# Altium PCB HB_mini_alt_PCB.PcbDoc
Units mm, origin at the board's own origin, x right, y up, seen from the top; angles counter-clockwise.
Board outline 59.4 x 59.4 mm, 2 copper layers (Top Layer, Bottom Layer), stack 0.971 mm thick; 98 components, 57 nets, 300 pads, 177 vias.
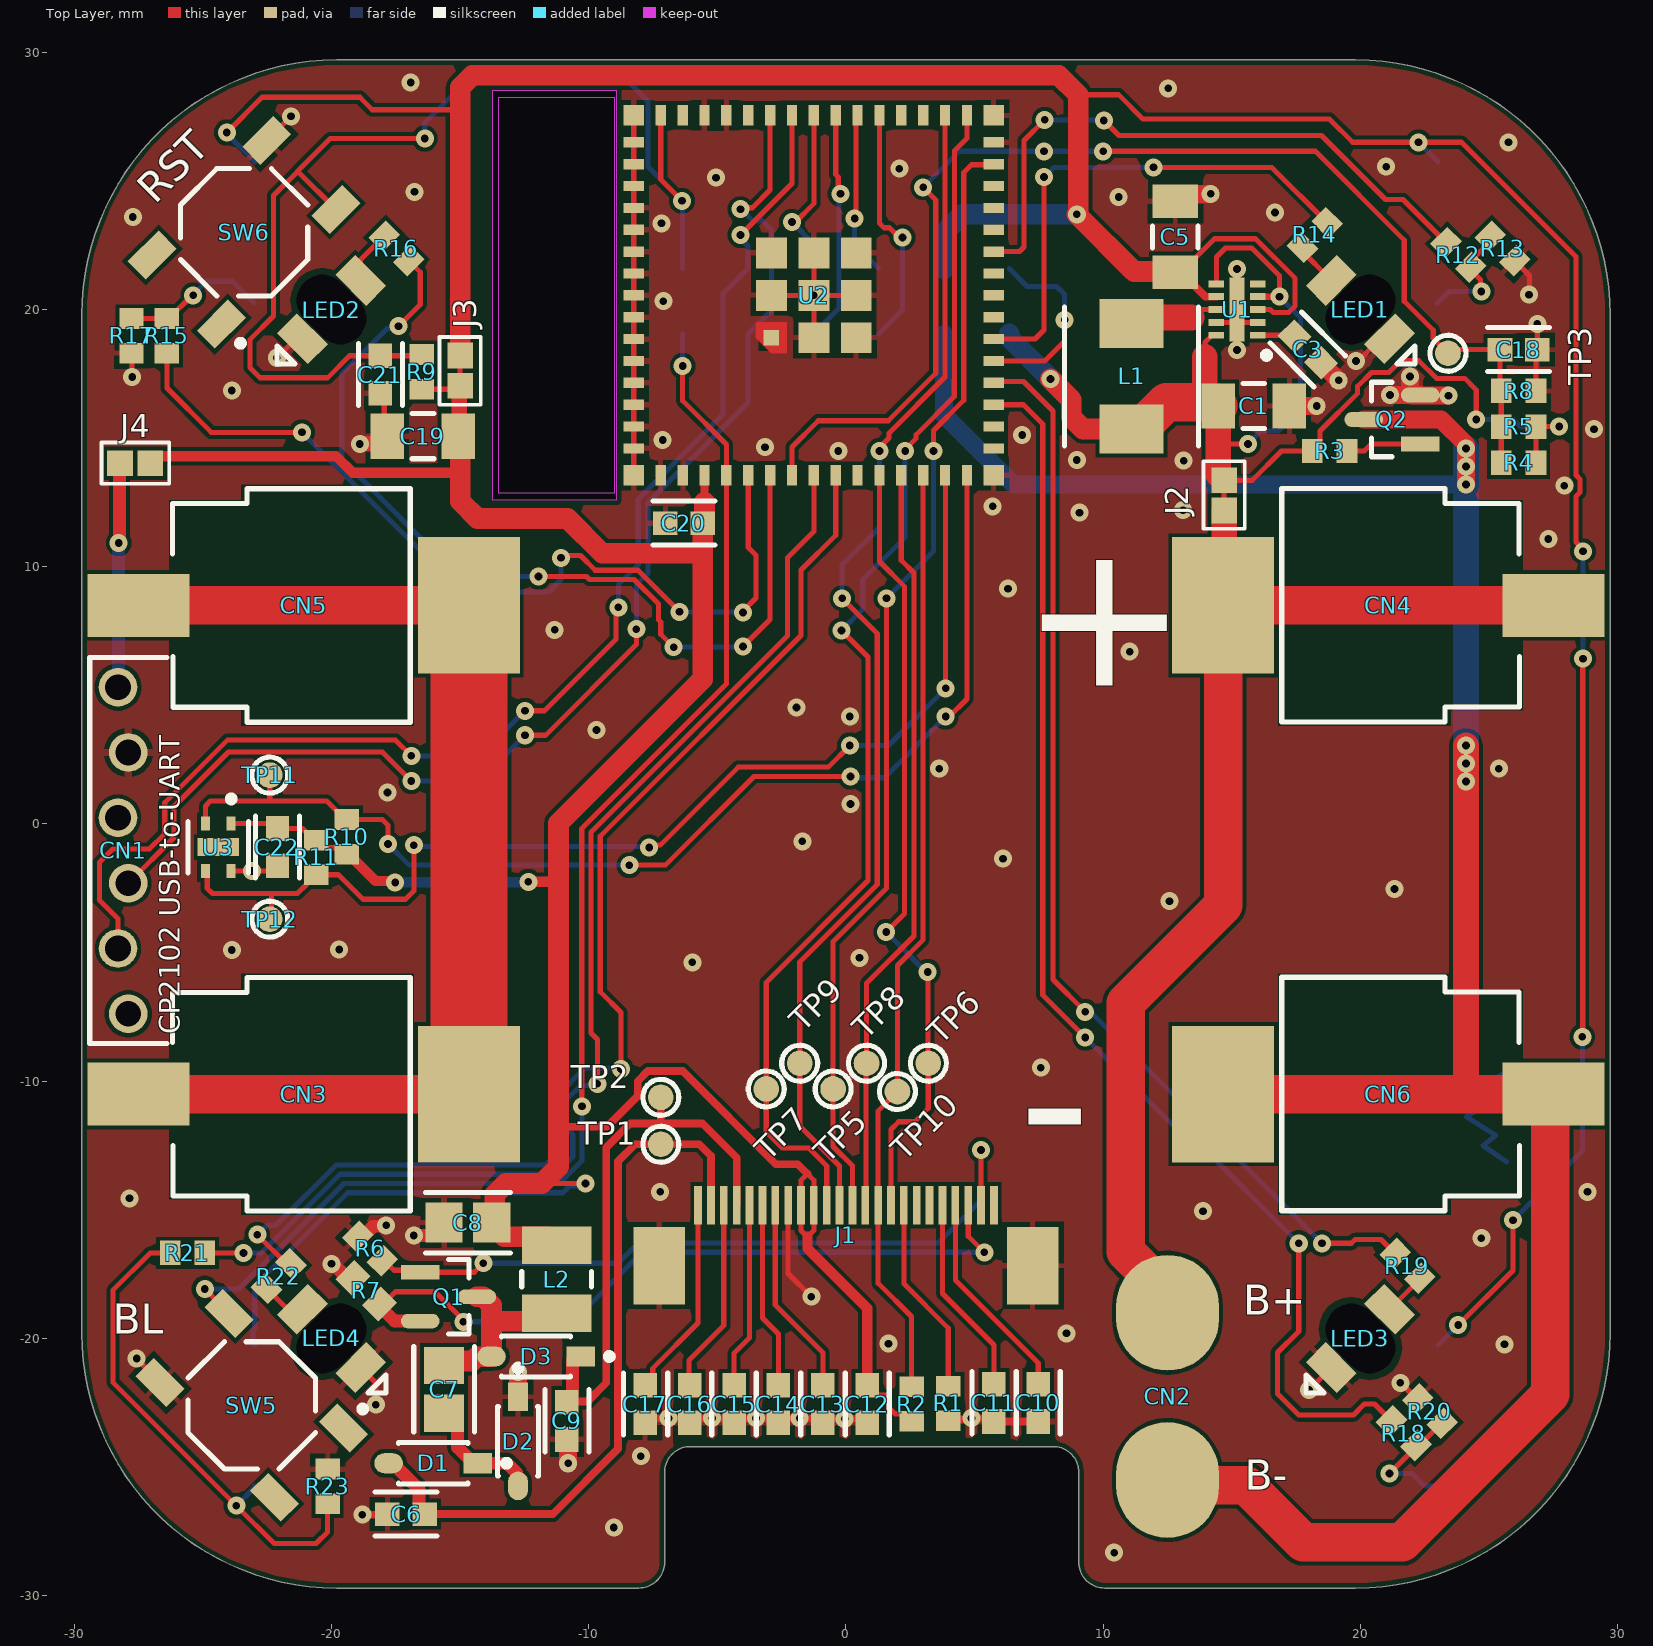
[diagram p0: Top Layer view]
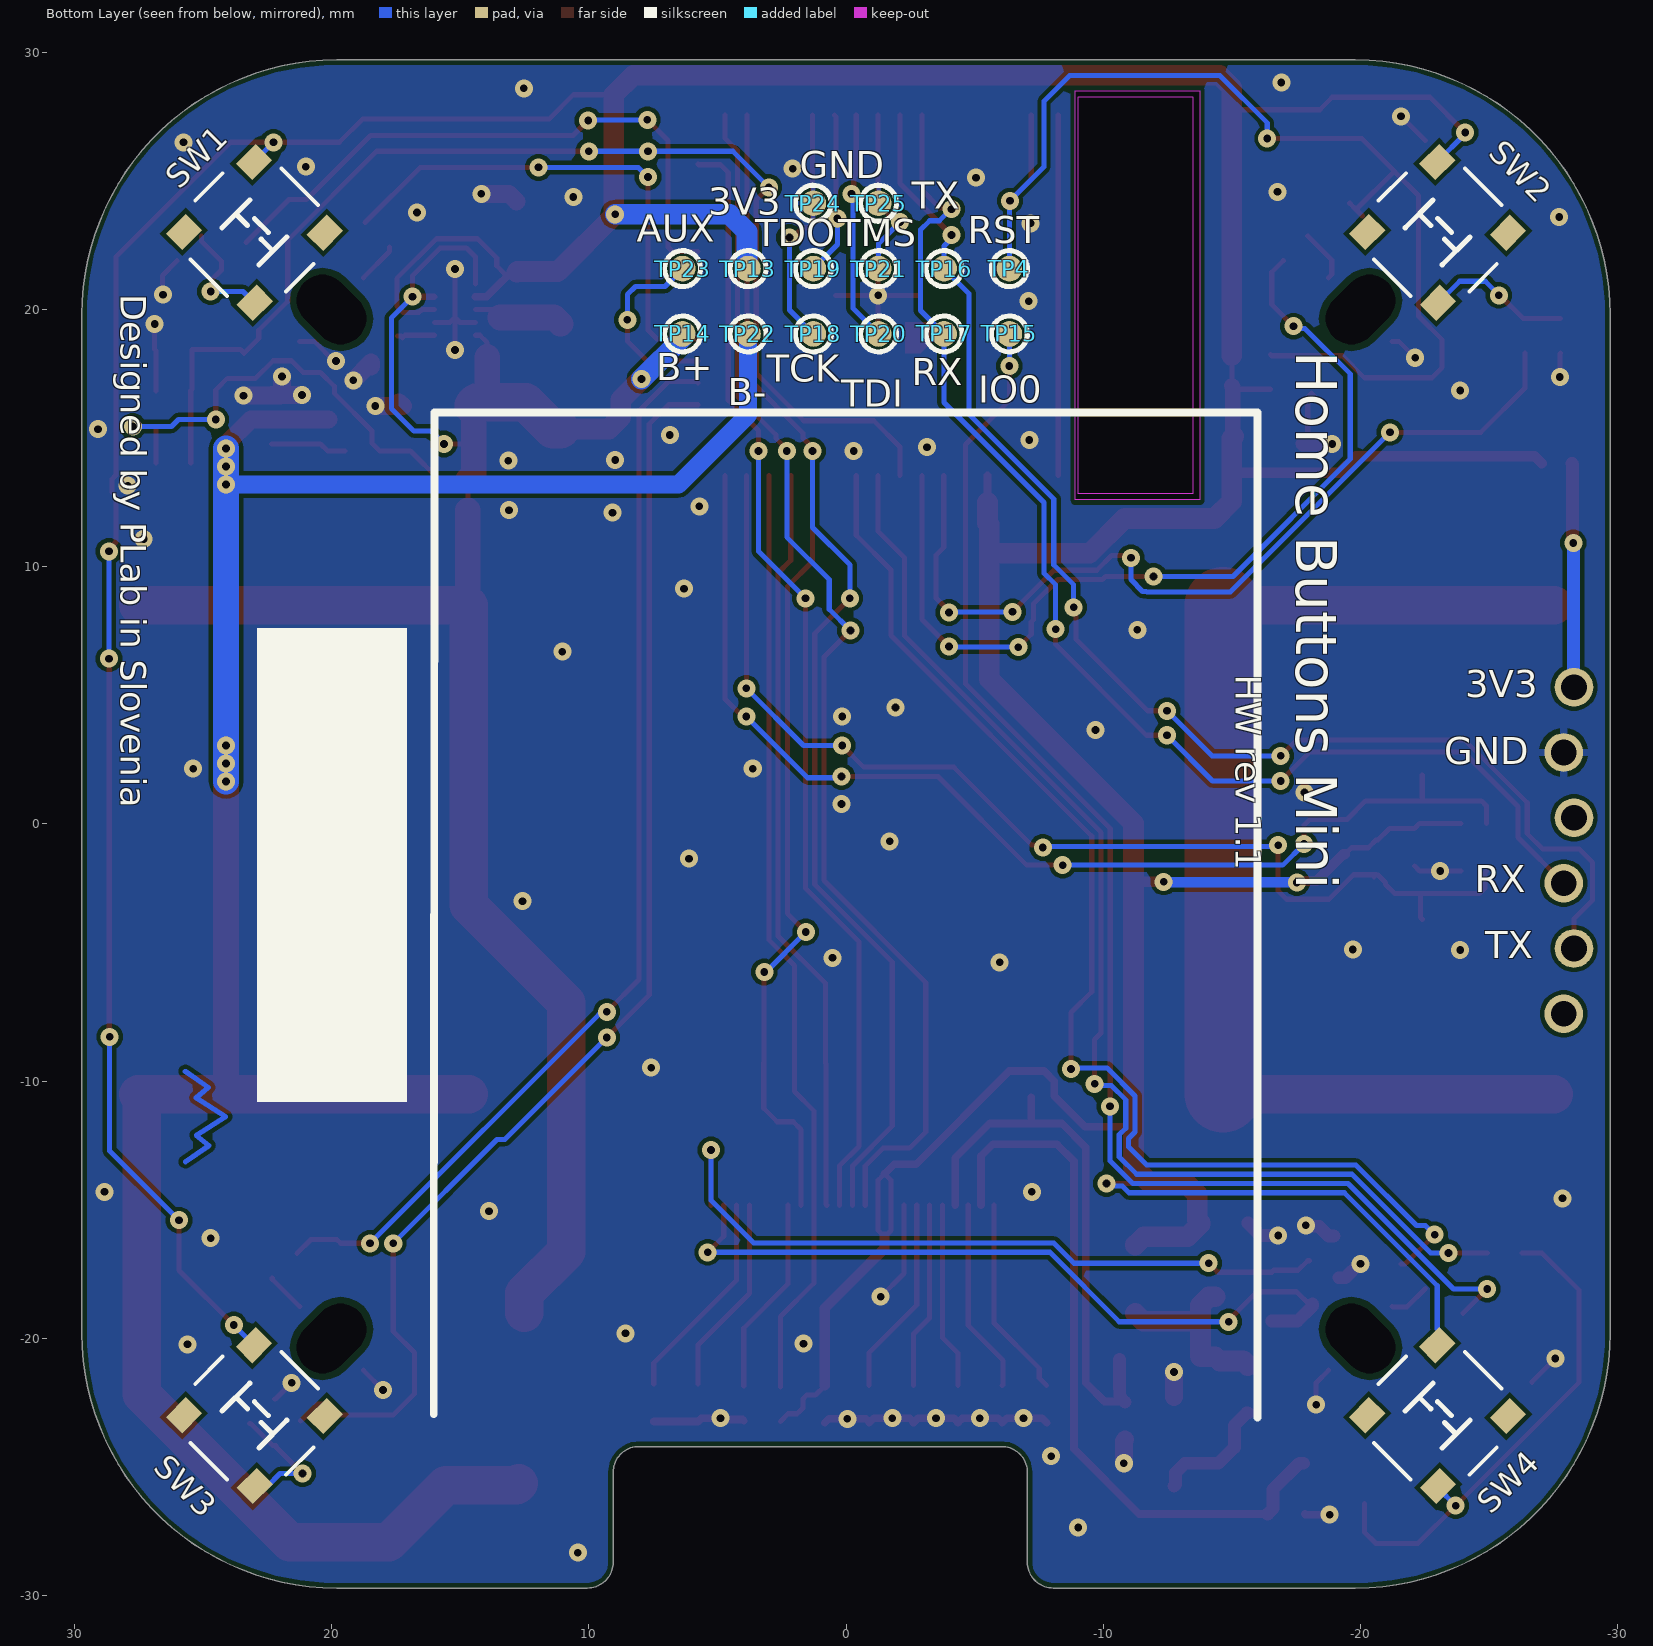
[diagram p1: Bottom Layer view, seen from below]
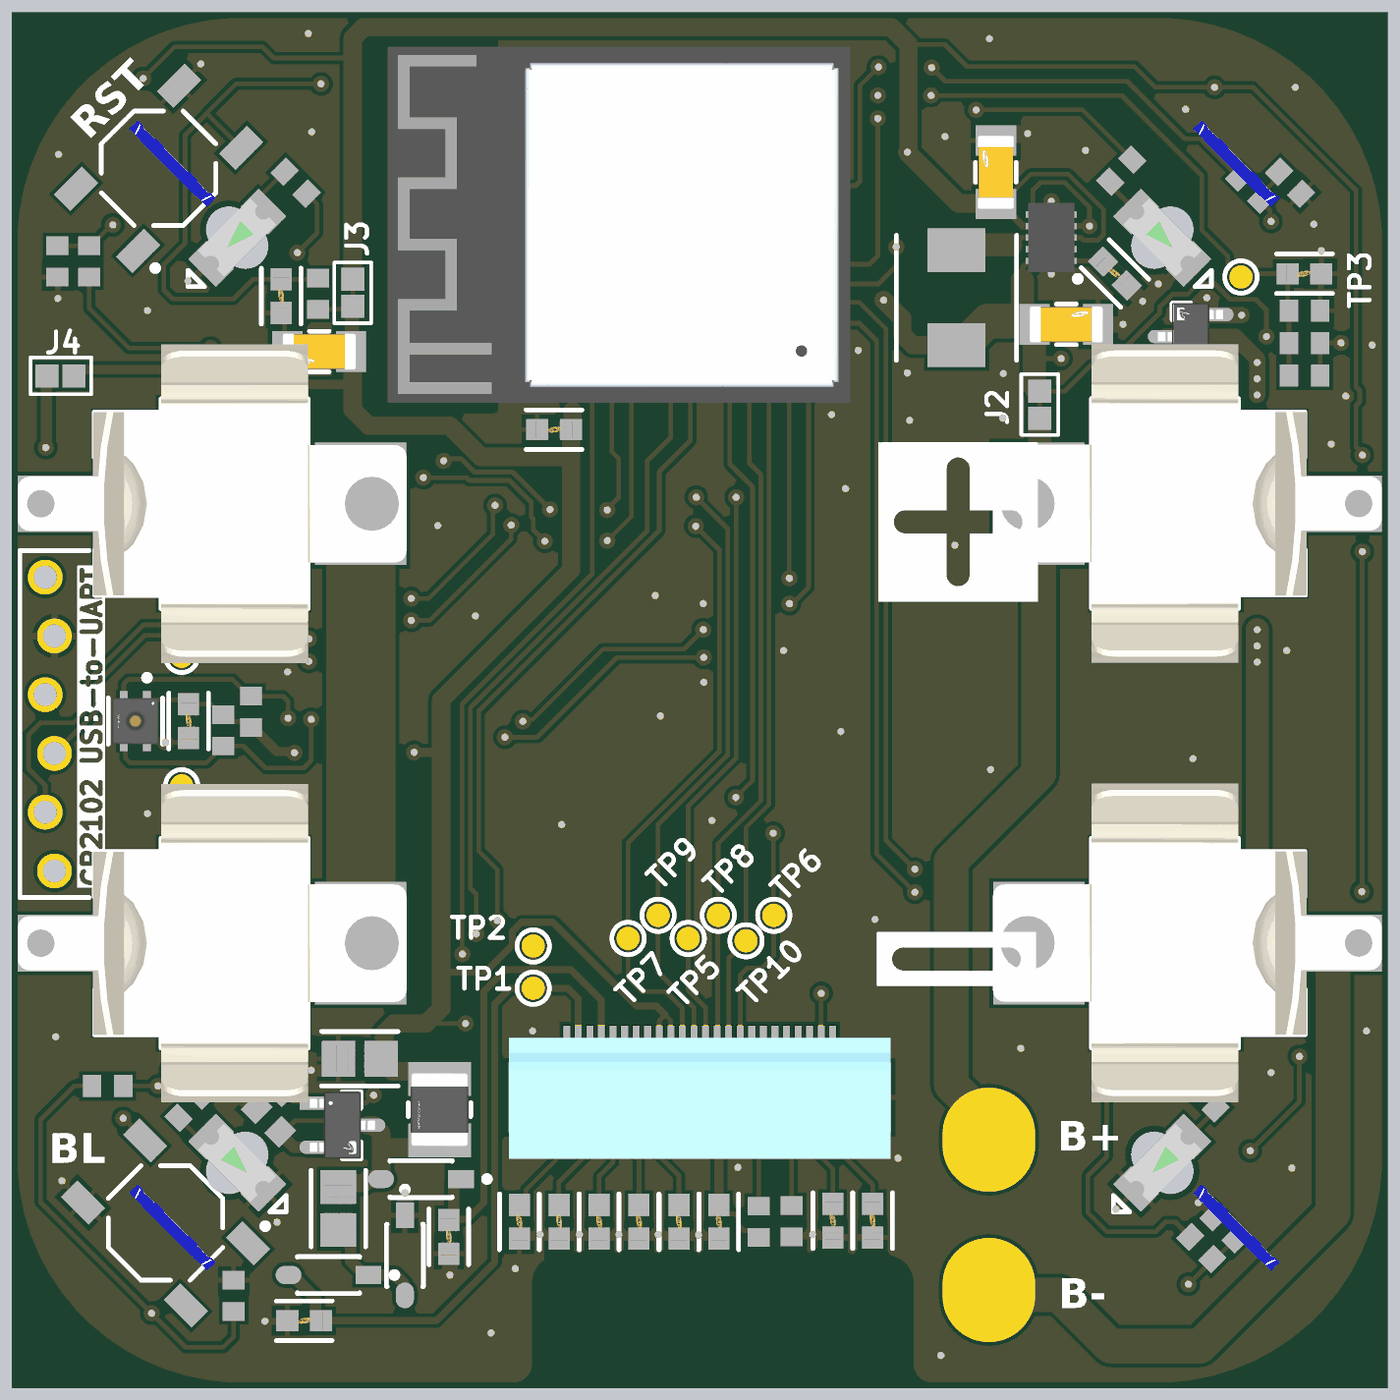
[diagram p2: 3D render of the assembled board from above, using the file's embedded part models]
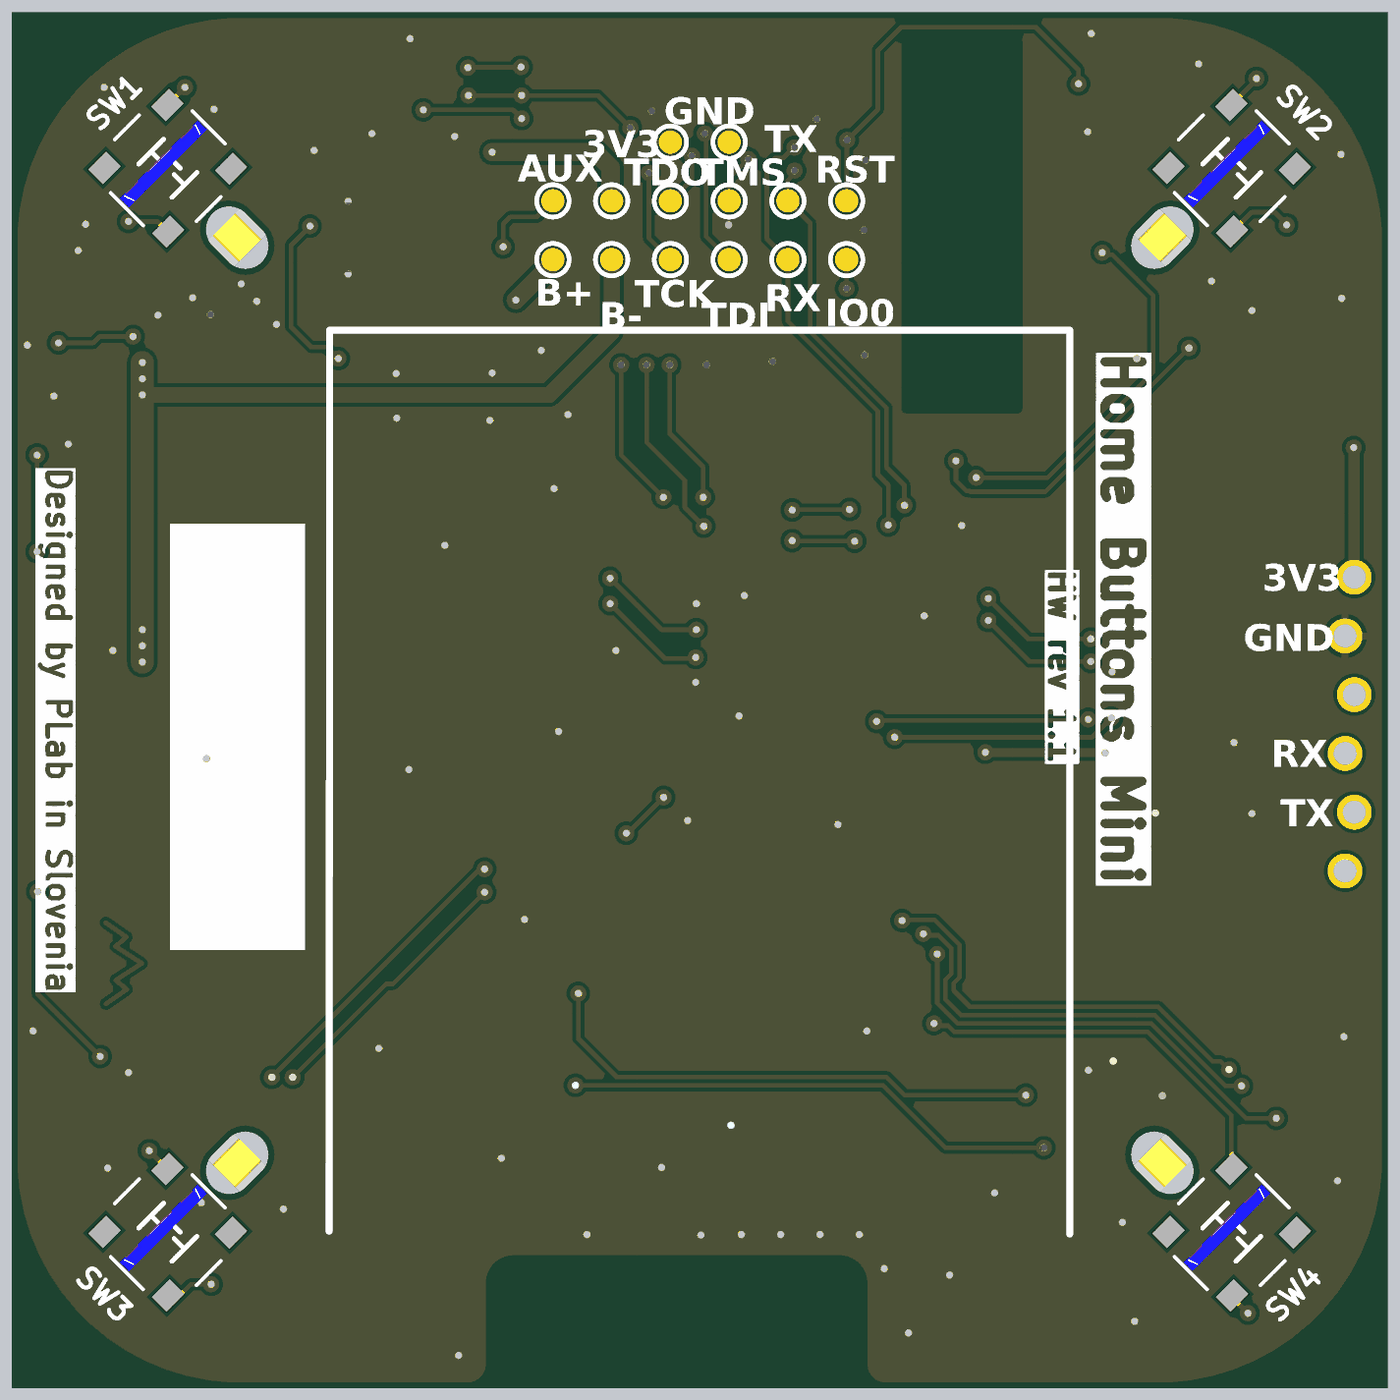
[diagram p3: 3D render of the assembled board from below, using the file's embedded part models]

## Layer stack, top to bottom
Top Solder: solder mask 0.0102, Solder Resist, Dk 3.5
Top Layer: signal copper 0.0356
Dielectric 1: dielectric 0.9, FR-4, Dk 4.8
Bottom Layer: signal copper 0.0356
Bottom Solder: solder mask 0.0102, Solder Resist, Dk 3.5

## Board outline
-19.8,-29.7 -8.05,-29.7 ccw(c-8.05,-28.7) -7.05,-28.7 -7.05,-25.2 cw(c-6.05,-25.2) -6.05,-24.2 8.05,-24.2 cw(c8.05,-25.2) 9.05,-25.2 9.05,-28.7 ccw(c10.05,-28.7) 10.05,-29.7 19.8,-29.7 ccw(c19.8,-19.8) 29.7,-19.8 29.7,19.8 ccw(c19.8,19.8) 19.8,29.7 -19.8,29.7 ccw(c-19.8,19.8) -29.7,19.8 -29.7,-19.8 ccw(c-19.8,-19.8)
cut-out: -13.75,28.5 -13.75,12.6 -8.919,12.6 -8.919,28.5

## Design rules (kind name [scope] priority, off if disabled: settings)
BoardOutlineClearance [All] p1: gap=0.2 ignorepadtopadclearanceinfootprint=FALSE
Clearance [All] p1: gap=0.16 ignorepadtopadclearanceinfootprint=FALSE except(0.15: SMDPad-Hole; 0.25: Arc-Hole Track-Hole THPad-Hole Via-Hole Fill-Hole Poly-Hole Region-Hole Text-Hole)
ComponentClearance [All] p1: gap=0 collisioncheckmode=3 verticalgap=0 showdistances=TRUE
DiffPairsRouting [All] p1: maxlimit=0.15 minlimit=0.15 mostfreqgap=0.15 toplayer_minwidth=0.2 toplayer_maxwidth=0.335 toplayer_prefwidth=0.335 bottomlayer_minwidth=0.2 bottomlayer_maxwidth=0.335 bottomlayer_prefwidth=0.335 impedanceprofiledriven=TRUE maxuncoupledlength=12.7
Height [All] p1: minheight=0 maxheight=1816.048 prefheight=12.7
HoleSize [All] p1: absolutevalues=TRUE maxlimit=6.3 minlimit=0.3 maxpercent=80.000 minpercent=20.000
HoleToHoleClearance [All] p1: gap=0.25 allowstackedmicrovias=FALSE
MinimumAnnularRing [All] p1: minimumring=0.2
MinimumSolderMaskSliver [All] p1: minsoldermaskwidth=0
PasteMaskExpansion [All] p1: expansion=0 percent=-10.000000
PlaneClearance [All] p1: clearance=0.102
PlaneConnect PlaneConnectPowerPads [InPadClass('PowerPads')] p1: planeconnectstyle=Direct reliefexpansion=0.508 reliefentries=4 reliefconductorwidth=0.254 reliefairgap=0.254
PlaneConnect [All] p2: pad.planeconnectstyle=Relief pad.reliefexpansion=0.3 pad.reliefentries=4 pad.reliefconductorwidth=0.102 pad.reliefairgap=0.102 via.planeconnectstyle=Direct via.reliefexpansion=0.3 via.reliefentries=4 via.reliefconductorwidth=0.127 via.reliefairgap=0.127
PolygonConnect PolygonConnectPowerPads [All vs (InPadClass('PowerPads'))] p1: connectstyle=Direct reliefconductorwidth=0.254 reliefentries=4 polygonreliefangle="90 Angle" airgapwidth=0.254
PolygonConnect [All] p2: thpad.connectstyle=Relief thpad.reliefconductorwidth=0.3 thpad.reliefentries=4 thpad.polygonreliefangle="90 Angle" thpad.airgapwidth=0.2 smdpad.connectstyle=Relief smdpad.reliefconductorwidth=0.2 smdpad.reliefentries=4 smdpad.polygonreliefangle="90 Angle" smdpad.airgapwidth=0.2 via.connectstyle=Direct via.reliefconductorwidth=0.127 via.reliefentries=4 via.polygonreliefangle="90 Angle" via.airgapwidth=0.127
RoutingVias [All] p1: holewidth=0.3 width=0.7 viastyle="Through Hole" minholewidth=0.3 minwidth=0.7 maxholewidth=6.3 maxwidth=6.55
SilkToSilkClearance [All] p1: silktosilkclearance=0
SilkToSolderMaskClearance [IsPad] p1: minsilkscreentomaskgap=0.08 clearancetoexposedcopper=TRUE
SolderMaskExpansion SolderMaskExpansion_VIAS [IsVia] p1: expansion=0.102 istentingtop=TRUE // SolderMask expansion for vias (defines tenting)
SolderMaskExpansion [All] p2: expansion=0 istentingtop=FALSE
Width [All] p1: maxlimit=1816.048 minlimit=0.09 preferedwidth=0.102 minimp=50.000000 maximp=50.000000 favimp=50.000000
19 further rules are at their usual default settings.

## Components (designator, comment, footprint, x,y, rotation, side; value= is the part's Value field where it differs from the comment)
C1 "CL31A107MQHNNNE" FP-CL31-IPC_B 15.85,16.25 r0 top
C3 "CL10A105KB8NNNC" FP-CL10B105KO8NNNC-IPC_B 17.95,18.45 r315 top value=1uF
C5 "CL31A107MQHNNNE" FP-CL31-IPC_B 12.8,22.825 r90 top
C6 "CL10A105KB8NNNC" FP-CL10B105KO8NNNC-IPC_B -17.102,-26.825 r180 top value=1uF
C7 "CL21A475KAQNNNE" FP-CL21-IPC_A -15.625,-21.975 r90 top
C8 "CL21A475KAQNNNE" FP-CL21-IPC_A -14.7,-15.5 r180 top
C9 "CL10A105KB8NNNC" FP-CL10B105KO8NNNC-IPC_B -10.85,-23.2 r270 top value=1uF
C10 "CL10A105KB8NNNC" FP-CL10B105KO8NNNC-IPC_B 7.475,-22.5 r270 top value=1uF
C11 "CL10A105KB8NNNC" FP-CL10B105KO8NNNC-IPC_B 5.75,-22.5 r270 top value=1uF
C12 "CL10A105KB8NNNC" FP-CL10B105KO8NNNC-IPC_B 0.825,-22.55 r270 top value=1uF
C13 "CL10A105KB8NNNC" FP-CL10B105KO8NNNC-IPC_B -0.9,-22.55 r270 top value=1uF
C14 "CL10A105KB8NNNC" FP-CL10B105KO8NNNC-IPC_B -2.625,-22.55 r270 top value=1uF
C15 "CL10A105KB8NNNC" FP-CL10B105KO8NNNC-IPC_B -4.35,-22.55 r270 top value=1uF
C16 "CL10A105KB8NNNC" FP-CL10B105KO8NNNC-IPC_B -6.075,-22.55 r270 top value=1uF
C17 "CL10A105KB8NNNC" FP-CL10B105KO8NNNC-IPC_B -7.8,-22.55 r270 top value=1uF
C18 "CL10A105KB8NNNC" FP-CL10B105KO8NNNC-IPC_B 26.148,18.442 r0 top value=1uF
C19 "CL31A107MQHNNNE" FP-CL31-IPC_B -16.45,15.075 r180 top
C20 "CL10A105KB8NNNC" FP-CL10B105KO8NNNC-IPC_B -6.3,11.7 r180 top value=1uF
C21 "CL10A105KB8NNNC" FP-CL10B105KO8NNNC-IPC_B -18.1,17.473 r270 top value=1uF
C22 "CL10A105KB8NNNC" FP-CL10B105KO8NNNC-IPC_B -22.1,-0.9 r270 top value=1uF
CN1 "CP2102 USB-A-to-UART adapter connector" "CP2102 USB-A-to-UART adapter connector" -27.9,-7.38 r180 top
CN2 "2 pin pogo connection" "2x2 POGO power landing pad" 12.5,-19 r270 top
CN3 "Battery contact" "MYOUNG MY-AA-04" -21.08,-10.5 r0 top locked
CN4 "Battery contact" "MYOUNG MY-AA-04" 21.08,8.5 r180 top locked
CN5 "Battery contact" "MYOUNG MY-AA-04" -21.08,8.5 r0 top locked
CN6 "Battery contact" "MYOUNG MY-AA-04" 21.08,-10.5 r180 top locked
D1 "MBR0530" FP-425-04-IPC_B -16.05,-24.85 r180 top
D2 "MBR0530" FP-425-04-IPC_B -12.75,-24 r270 top
D3 "MBR0530" FP-425-04-IPC_B -12.05,-20.7 r180 top
J1 "XFCN F0501-T-24-20T-R" "XFCN F0501-T-24-20T-R" 0,-14.6 r0 top
J2 "SolderJumper" AislerRule_SolderJumper_1mm 14.7,12.2 r270 top
J3 "SolderJumper" AislerRule_SolderJumper_1mm -15,18.2 r90 top
J4 "SolderJumperV2" AislerRule_SolderJumper_1mm -28.21,14.025 r180 top
L1 "MCS0530-4R7MN2" "MCS0530-4R7MN2 - NEW" 11.1,17.4 r90 top
L2 "CBC3225T470KR" FP-CB3225-IPC_B -11.25,-17.7 r270 top
LED1 "EKINGLUX E6CC1206CWAY1UDA" "EKINGLUX E6CC1206CWAY1UDA" 20,20 r135 top
LED2 "EKINGLUX E6CC1206CWAY1UDA" "EKINGLUX E6CC1206CWAY1UDA" -20,20 r45 top
LED3 "EKINGLUX E6CC1206CWAY1UDA" "EKINGLUX E6CC1206CWAY1UDA" 20,-20 r45 top
LED4 "EKINGLUX E6CC1206CWAY1UDA" "EKINGLUX E6CC1206CWAY1UDA" -20,-20 r135 top
Q1 "BM3402" FP-SOT23-IPC_B -15.45,-18.375 r0 top
Q2 "BM3402" FP-SOT23-IPC_B 21.225,15.725 r180 top
R1 "0603WAF1004T5E" RESC1608X55X30NL15T15 3.975,-22.525 r90 top value=1M
R2 "0603WAF1004T5E" RESC1608X55X30NL15T15 2.55,-22.55 r90 top value=1M
R3 "0603WAF1002T5E" RESC1608X55X30NL15T15 18.8,14.5 r180 top value=10k
R4 "0603WAF1004T5E" RESC1608X55X30NL15T15 26.148,14.042 r0 top value=1M
R5 "0603WAF1004T5E" RESC1608X55X30NL15T15 26.148,15.442 r0 top value=1M
R6 "0603WAF1002T5E" RESC1608X55X30NL15T15 -18.5,-16.5 r315 top value=10k
R7 "0603WAF220KT5E" RESC1608X55X30ML15T15 -18.65,-18.15 r135 top value=2R2
R8 "0603WAF1004T5E" RESC1608X55X30NL15T15 26.148,16.842 r180 top value=1M
R9 "0603WAF1002T5E" RESC1608X55X30NL15T15 -16.5,17.575 r270 top value=10k
R10 "0603WAF1002T5E" RESC1608X55X30NL15T15 -19.4,-0.5 r270 top value=10k
R11 "0603WAF1002T5E" RESC1608X55X30NL15T15 -20.6,-1.3 r90 top value=10k
R12 "0603WAF1004T5E" RESC1608X55X30NL15T15 23.802,22.123 r135 top value=1M
R13 "0603WAF1002T5E" RESC1608X55X30NL15T15 25.525,22.375 r135 top value=10k
R14 "0603WAF100JT5E" RESC1608X55X30NL15T15 18.225,22.9 r225 top value=10
R15 "0603WAF1004T5E" RESC1608X55X30NL15T15 -26.4,18.975 r270 top value=1M
R16 "0603WAF100JT5E" RESC1608X55X30NL15T15 -17.475,22.375 r135 top value=10
R17 "0603WAF1002T5E" RESC1608X55X30NL15T15 -27.775,18.975 r90 top value=10k
R18 "0603WAF1004T5E" RESC1608X55X30NL15T15 21.682,-23.682 r135 top value=1M
R19 "0603WAF100JT5E" RESC1608X55X30NL15T15 21.825,-17.175 r315 top value=10
R20 "0603WAF1002T5E" RESC1608X55X30NL15T15 22.7,-22.825 r315 top value=10k
R21 "0603WAF1004T5E" RESC1608X55X30NL15T15 -25.6,-16.675 r0 top value=1M
R22 "0603WAF100JT5E" RESC1608X55X30NL15T15 -22.05,-17.575 r225 top value=10
R23 "0603WAF1002T5E" RESC1608X55X30NL15T15 -20.15,-25.75 r270 top value=10k
SW1 "Alps SKRB" "Alps SKRB" 23,23 r315 bottom
SW2 "Alps SKRB" "Alps SKRB" -23,23 r315 bottom
SW3 "Alps SKRB" "Alps SKRB" 23,-23 r315 bottom
SW4 "Alps SKRB" "Alps SKRB" -23,-23 r315 bottom
SW5 "TS-1187A-B-A-B" ESWI-TL3342F160QG_V -23.1,-22.6 r225 top
SW6 "TS-1187A-B-A-B" ESWI-TL3342F160QG_V -23.4,23 r135 top
TP1 "test point 1.5mm" TP1_FULL -7.2,-12.45 r0 top
TP2 "test point 1.5mm" TP1_FULL -7.2,-10.625 r90 top
TP3 "test point 1.5mm" TP1_FULL 23.4,18.3 r90 top
TP4 "test point 1.5mm" TP1_FULL -6.35,21.59 r0 bottom
TP5 "test point 1.5mm" TP1_FULL -0.5,-10.3 r90 top
TP6 "test point 1.5mm" TP1_FULL 3.2,-9.3 r90 top
TP7 "test point 1.5mm" TP1_FULL -3.1,-10.3 r90 top
TP8 "test point 1.5mm" TP1_FULL 0.8,-9.3 r90 top
TP9 "test point 1.5mm" TP1_FULL -1.8,-9.3 r90 top
TP10 "test point 1.5mm" TP1_FULL 2,-10.4 r90 top
TP11 "test point 1.5mm" TP1_FULL -22.4,1.9 r90 top
TP12 "test point 1.5mm" TP1_FULL -22.4,-3.7 r90 top
TP13 "test point 1.5mm" TP1_FULL 3.81,21.59 r90 bottom
TP14 "test point 1.5mm" TP1_FULL 6.35,19.05 r90 bottom
TP15 "test point 1.5mm" TP1_FULL -6.35,19.05 r90 bottom
TP16 "test point 1.5mm" TP1_FULL -3.81,21.59 r90 bottom
TP17 "test point 1.5mm" TP1_FULL -3.81,19.05 r90 bottom
TP18 "test point 1.5mm" TP1_FULL 1.27,19.05 r90 bottom
TP19 "test point 1.5mm" TP1_FULL 1.27,21.59 r90 bottom
TP20 "test point 1.5mm" TP1_FULL -1.27,19.05 r0 bottom
TP21 "test point 1.5mm" TP1_FULL -1.27,21.59 r90 bottom
TP22 "test point 1.5mm" TP1_FULL 3.81,19.05 r90 bottom
TP23 "test point 1.5mm" TP1_FULL 6.35,21.59 r90 bottom
TP24 "test point 1.5mm" TP1_FULL 1.27,24.13 r90 bottom
TP25 "test point 1.5mm" TP1_FULL -1.27,24.13 r90 bottom
U1 "BU33UV7NUX-E2" VSON010X3020 15.2,20 r90 top
U2 "ESP32-S2-MINI-2-N4" XCVR_ESP32-S2-MINI-1 -1.25,20.55 r90 top
U3 "SHTC3" FP-SHTC3-MFG -24.4,-0.9 r270 top

## Footprints (in the part's own frame and the unit in brackets; to place one, negate y for a bottom-side part, rotate by r counter-clockwise, add the part's x,y. Pads: shape width x height; smd on the part's side, far side on the other; paste and mask are expansions set on the pad)
"2x2 POGO power landing pad" [mm] "for HB Mini"
  oval 4.5x4 smd paste-2 mask+0: 1(0,0) 2(6.5,0)
AislerRule_SolderJumper_1mm [mm]
  rect 1x1 smd: 1(-1.16,0) 2(0.01,0)
  silkscreen extent -1.9,-0.8 0.73,0.8
"Alps SKRB" [mm] "Alps SKRB SMD tactile button"
  rect 1.1x0.9 smd mask+0.05: 1(-1.925,1.95) 2(-1.925,-1.95) 3(1.925,1.95) 4(1.925,-1.95)
  silkscreen extent -2.5,-2.5 2.5,2.5, body extent -2.4,-2.4 2.4,2.4, height 0.55
"CP2102 USB-A-to-UART adapter connector" [mm] "staggered holes for press fit"
  round 1.5 hole 1: 1(0,0) 2(0.4,-2.54) 3(0,-5.08) 4(0.4,-7.62) 5(0,-10.16) 6(0.4,-12.7)
  silkscreen extent -1.5,-13.85 1.5,1.15
"EKINGLUX E6CC1206CWAY1UDA" [mm] "Reverse mount SMD LED, cool white"
  rect 1.1x1.7 smd: 1(1.6,0) 2(-1.6,0)
  round 0 hole 2 slot 3 at 90 deg unplated: 4(0,0)
  silkscreen extent -3,-0.5 -2.5,0.5, body extent -1.6,-0.8 1.6,0.8, height 0.5
ESWI-TL3342F160QG_V [mm] "SMD, 4-Leads, Body 5x5mm, Pitch 6.3mm"
  rect 1x1.7 smd: 1(-1.9,3.15) 2(-1.9,-3.15) 3(1.9,3.15) 4(1.9,-3.15)
  silkscreen extent -3.07,-2.5 2.5,3.27, body extent -2.5,-2.5 2.5,2.5, height 1.5
FP-425-04-IPC_B [mm]
  rect 1.108x0.782 smd paste+0 mask+0: 1(-1.73,0)
  rrect100% 1.108x0.782 smd paste+0 mask+0: 2(1.73,0)
  silkscreen extent -2.97,-0.8 1.35,0.8
FP-CB3225-IPC_B [mm]
  rect 1.454x2.706 smd paste+0 mask+0: 1(-1.326,0) 2(1.326,0)
  silkscreen extent -0.3,-1.35 0.3,1.35, body extent -2.3,-1.6 2.3,1.6, height 0.25
FP-CL10B105KO8NNNC-IPC_B [mm]
  rect 0.958x0.912 smd paste+0 mask+0: 1(-0.727,0) 2(0.727,0)
  silkscreen extent -1.21,-0.86 1.21,0.86, body extent -1.46,-0.71 1.46,0.71, height 0.25
FP-CL21-IPC_A [mm]
  rect 1.455x1.556 smd paste+0 mask+0: 1(-0.926,0) 2(0.926,0)
  silkscreen extent -1.65,-1.18 1.65,1.18, body extent -2.15,-1.28 2.15,1.28, height 0.25
FP-CL31-IPC_B [mm]
  rect 1.305x1.758 smd paste+0 mask+0: 1(-1.376,0) 2(1.376,0)
  silkscreen extent -0.42,-0.88 0.42,0.88, body extent -2.28,-1.13 2.28,1.13, height 0.25
FP-SHTC3-MFG [mm]
  rect 0.55x0.35 smd paste-1000 mask-1000: 1(-0.925,0.5) 2(-0.925,-0.5) 3(0.925,-0.5) 4(0.925,0.5)
  rect 0.7x1.6 smd paste-1000 mask+0: 5(0,0)
  silkscreen extent -2,-1.17 1,1.18, body extent -1.4,-1.1 1.4,1.1, height 0.25
FP-SOT23-IPC_B [mm]
  rect 1.505x0.572 smd paste+0 mask+0: 1(-1.1,0.95)
  rrect100% 1.505x0.572 smd paste+0 mask+0: 2(-1.1,-0.95) 3(1.1,0)
  silkscreen extent 0,-1.45 0.8,1.45, body extent -2.1,-1.7 2.1,1.7, height 0.25
"MCS0530-4R7MN2 - NEW" [mm] "SMD inductor 4.7uH, 5A Isat, 5.4mmx5.2mm"
  rect 1.9x2.5 smd: 1(-2.05,0) 2(2.05,0)
  silkscreen extent -2.7,-2.6 2.7,2.6, body extent -2.7,-2.6 2.7,2.6, height 3
"MYOUNG MY-AA-04" [mm] "AA battery clip holder"
  rect 3.96x2.45 smd: 1(-6.43,0)
  rect 3.96x5.3 smd: 1(6.42,0)
  Top Layer pour cut-out: 4.3,4.7 -2.45,4.7 -2.45,4.1 -5.25,4.1 -5.25,-4.1 -2.45,-4.1 -2.45,-4.7 4.3,-4.7
  silkscreen extent -5.1,-4.54 4.14,4.53, body extent -8.41,-6.91 8.4,6.9, height 15.46
RESC1608X55X30ML15T15 [mm] "Chip Resistor, 2-Leads, Body 1.60x0.80mm, IPC Low Density"
  rect 0.9x1.05 smd: 1(-0.725,0) 2(0.725,0)
  body extent -0.87,-0.48 0.88,0.48, height 0.55
RESC1608X55X30NL15T15 [mm] "Chip Resistor, 2-Leads, Body 1.60x0.80mm, IPC Medium Density"
  rect 0.8x0.95 smd: 1(-0.675,0) 2(0.675,0)
  body extent -0.87,-0.48 0.87,0.48, height 0.55
TP1_FULL [mm]
  round 1 smd paste-0.5: 1(0,0)
  silkscreen extent -0.7,-0.7 0.7,0.7
VSON010X3020 [mm] "VSON010X3020 for BU33UV7NUX-E2"
  rect 0.27x0.6 smd: 1(-1,-0.8) 2(-0.5,-0.8) 3(0,-0.8) 4(0.5,-0.8) 5(1,-0.8) 6(1,0.8) 7(0.5,0.8) 8(0,0.8) 9(-0.5,0.8) 10(-1,0.8)
  rect 2.49x0.6 smd: PAD(0,0)
  silkscreen extent -1.9,-1.27 -1.65,-1.02, body extent -1.5,-1 1.5,1, height 0.55
XCVR_ESP32-S2-MINI-1 [mm]
  rect 0.8x0.4 smd: 1(-7,5.95) 2(-7,5.1) 3(-7,4.25) 4(-7,3.4) 5(-7,2.55) 6(-7,1.7) 7(-7,0.85) 8(-7,0) 9(-7,-0.85) 10(-7,-1.7) 11(-7,-2.55) 12(-7,-3.4) 13(-7,-4.25) 14(-7,-5.1) 15(-7,-5.95) 31(7,-5.95) 32(7,-5.1) 33(7,-4.25) 34(7,-3.4) 35(7,-2.55) 36(7,-1.7) 37(7,-0.85) 38(7,0) 39(7,0.85) 40(7,1.7) 41(7,2.55) 42(7,3.4) 43(7,4.25) 44(7,5.1) 45(7,5.95)
  rect 0.4x0.8 smd: 16(-5.95,-7) 17(-5.1,-7) 18(-4.25,-7) 19(-3.4,-7) 20(-2.55,-7) 21(-1.7,-7) 22(-0.85,-7) 23(0,-7) 24(0.85,-7) 25(1.7,-7) 26(2.55,-7) 27(3.4,-7) 28(4.25,-7) 29(5.1,-7) 30(5.95,-7) 46(5.95,7) 47(5.1,7) 48(4.25,7) 49(3.4,7) 50(2.55,7) 51(1.7,7) 52(0.85,7) 53(0,7) 54(-0.85,7) 55(-1.7,7) 56(-2.55,7) 57(-3.4,7) 58(-4.25,7) 59(-5.1,7) 60(-5.95,7)
  rect 1.2x1.2 smd: 61(0,0) 61_1(-1.65,0) 61_2(-1.65,-1.65) 61_3(0,-1.65) 61_4(1.65,-1.65) 61_5(1.65,0) 61_6(1.65,1.65) 61_7(0,1.65)
  rect 0.6x0.6 smd paste-1 mask+0: 61_8(-1.65,1.65)
  rect 0.8x0.8 smd: 62(-7,7) 63(-7,-7) 64(7,-7) 65(7,7)
  Top Layer region: -1.05,1.05 -2.25,1.05 -2.25,1.65 -1.65,2.25 -1.05,2.25
  Keep-Out Layer region: 7.7,7.75 -7.7,7.75 -7.7,12.25 7.7,12.25
  Keep-Out Layer region: 7.7,7.75 -7.7,7.75 -7.7,12.25 7.7,12.25
  body extent -7.7,-7.75 7.7,12.25, height 2.55
"XFCN F0501-T-24-20T-R" [mm]
  rect 0.3x1.5 smd mask+0.05: 1(5.75,-0.219) 2(5.25,-0.219) 3(4.75,-0.219) 4(4.25,-0.219) 5(3.75,-0.219) 6(3.25,-0.219) 7(2.75,-0.219) 8(2.25,-0.219) 9(1.75,-0.219) 10(1.25,-0.219) 11(0.75,-0.219) 12(0.25,-0.219) 13(-0.25,-0.219) 14(-0.75,-0.219) 15(-1.25,-0.219) 16(-1.75,-0.219) 17(-2.25,-0.219) 18(-2.75,-0.219) 19(-3.25,-0.219) 20(-3.75,-0.219) 21(-4.25,-0.219) 22(-4.75,-0.219) 23(-5.25,-0.219) 24(-5.75,-0.219)
  rect 2x3 smd: MP1(-7.265,-2.569) MP2(7.265,-2.569)
  body extent -8.25,-5.22 8.25,0, height 2.15

## Part data
C1 C5 C19: library part CMP-13271-002604-1, "Cap Ceramic 100uF 6.3V X5R ±10% SMD 1206", Capacitance=100uF, Case Code (Imperial)=1206, Case Code (Metric)=3216, Dielectric=X5R, JLCPCB part #=C15008, Max Operating Temperature=85°C, Min Operating Temperature=-55°C, Package Quantity=1, Tolerance=10%, Voltage Rating=6.3V, Case/Package=1206, Depth=1.6mm, Height=1.6mm, Lead Free="Lead Free", Length=3.2mm, Mount="Surface Mount", Packaging="Tape and Reel", Radiation Hardening=No, Thickness=0.071inch, Voltage Rating (DC)=6.3V, Width=0.063inch
C3 C6 C9 C10 C11 C12 C13 C14 C15 C16 C17 C18 C20 C21 C22: library part CMP-2000-06093-2, "CAP CER 1UF 50V X5R 0603", Capacitance=1uF, JLCPCB part #=C15849, Manufacturer="Samsung Electro-Mechanics America, Inc", Manufacturer Part Number=CL10B105KO8NNNC, Temperature="-55°C to +125°C", Temperature Characteristic=X5R, Temperature Coefficient=15%, Temperature Range High=+125°C, Temperature Range Low=-55°C, Tolerance=10%, Voltage Rating=50V, Automotive=No, Category=Cap, ComponentLink2Description=Datasheet, ComponentLink2URL=http://www.samsungsem.com/global/front/downloadcms.do?path=%2F%2Fglobal%2F%2Fsupport%2F%2Fproduct-search%2F%2Fmlcc%2F%2F__icsFiles%2F%2Fafieldfile%2F%2F2019%2F%2F06%2F%2F18&fileName=CL10B105KO8NNNC-19.pdf, Device Class L1="Passive Components", Device Class L2=Capacitors, Device Class L3="Ceramic Capacitors", Digikey Description="CAP CER 1UF 16V X7R 0603", Height=0.9mm, Ipc Land Pattern Name=CAPC16080X80, Lead Free=Yes, Material=Ceramic, Octopart=https://octopart.com/cl10b105ko8nnnc-samsung-19018973, Package=CL10B105KO8NNNC, ROHS=TRUE
C7 C8: library part CMP-13271-002624-1, "CL21 Series 0805 4.7uF 25V ±10% Tolerance X5R Multilayer Ceramic Chip Capacitor", Capacitance=4.7uF, Case Code (Imperial)=0805, Case Code (Metric)=2012, Dielectric=X5R, JLCPCB part #=C1779, Max Operating Temperature=85°C, Min Operating Temperature=-55°C, Package Quantity=1, Tolerance=10%, Voltage Rating=25V, Case/Package=0805, Depth=1.25mm, Height=1.25mm, Lead Free="Lead Free", Length=2mm, Mount="Surface Mount", Packaging="Tape and Reel", Radiation Hardening=No, Thickness=0.055inch, Voltage Rating (DC)=25V, Width=0.049inch
CN3 CN4 CN5 CN6: "Battery contact with selectable footprint", JLCPCB part #=C2979179
D1 D2 D3: library part CMP-2000-05113-2, "DIODE SCHOTTKY 30V 500MA SOD123", Average Rectified Current=500mA, Forward Voltage=430mV, JLCPCB part #=C77336, Max Forward Surge Current (Ifsm)=5.5A, Max Operating Temperature=150°C, Max Repetitive Reverse Voltage (Vrrm)=30V, Max Reverse Leakage Current=130uA, Min Operating Temperature=-65°C, Package Quantity=1, Contact Plating=Tin, Current Rating=500mA, Element Configuration=Single, Forward Current=500mA, Height=1.03mm, Lead Free="Lead Free", Length=2.7mm, Max Reverse Voltage (DC)=30V, Max Surge Current=5.5A, Mount="Surface Mount", Number of Pins=2, Output Current=500mA, Packaging="Tape and Reel", Peak Non-Repetitive Surge Current=5.5A, Peak Reverse Current=130uA, Polarity=Standard, Radiation Hardening=No, REACH SVHC="No SVHC", Voltage Rating (DC)=30V, Weight=0.03g, Width=1.6mm
J1: "XFCN F0501-T-24-20T-R 0.5mm fpc top contacts, slide retentioner", JLCPCB part #=C840496
L1: library part PowerInductor, "SMD Power inductio, selectable footprint", JLCPCB part #=C2836880, ComponentLink1Description=Datasheet
L2: library part CMP-14484-000388-1, "SMD Inductors 47uH ±10% 0.48A 0.871Ω 1210", Case Code (Imperial)=1210, Case Code (Metric)=3225, Current Rating=480mA, DC Resistance (DCR)=871mR, Inductance=47uH, Inductance Tolerance=10%, JLCPCB part #=C90318, Max Operating Temperature=105°C, Min Operating Temperature=-40°C, Package Quantity=1000, Resistor Type=Wirewound, Saturation Current=390mA, Self Resonant Frequency=10MHz, Test Frequency=100kHz, Case/Package=1210, Core Material=Ferrite, DC Current=480mA, Depth=2.7mm, Halogen Free="Halogen Free", Height=2.5mm, Height - Seated (Max)=0.106inch, Lead Free="Lead Free", Length=0.126inch, Max DC Current=480mA, Military Standard=Not, Mount="Surface Mount", Packaging="Tape and Reel", Radiation Hardening=No, RoHS Compliant=Yes, Series=CB, Shielding=Unshielded, Termination=SMD/SMT, Tolerance=10%, Width=0.098inch
LED1 LED2 LED3 LED4: library part "Everlight Elec 23-21B/T1D-CP2Q2TY/2A", "reverse mount SMD led, cool white", JLCPCB part #=C375565
Q1 Q2: library part CMP-83955-000006-1, "BORN BM3402 MOSFET N-CH 30V 5.1A SOT23", JLCPCB part #=C431498
R1 R2 R4 R5 R8 R12 R15 R18 R21: library part CMP-1012-00849-2, JLCPCB part #=C22935, Manufacturer=Panasonic, Part Number=0603WAF1004T5E
R3 R6 R9 R10 R11 R13 R17 R20 R23: library part CMP-2000-00540-1, JLCPCB part #=C25804, Manufacturer=UNI_ROYAL, Part Number=0603WAF1002T5E
R7: library part CMP-2000-00787-1, JLCPCB part #=C22939, Manufacturer=UNI-ROYAL, Part Number=0603WAF220KT5E
R14 R16 R19 R22: library part CMP-2000-00540-1, JLCPCB part #=C22859, Manufacturer=UNI_ROYAL, Part Number=0603WAF100JT5E
SW1 SW2 SW3 SW4: "SKRB series SMD tactile button Alps Alpine", JLCPCB part #=C139790, ComponentLink1Description=Datasheet, ComponentLink1URL=https://tech.alpsalpine.com/prod/e/html/tact/surfacemount/skrb/skrbake010.html, Variant=SKRBAKE010
SW5 SW6: library part CMP-1696-00003-1, "XKB TS-1187A-B-A-B C318884", JLCPCB part #=C318884
TP1 TP2 TP3 TP4 TP5 TP6 TP7 TP8 TP9 TP10 TP11 TP12 TP13 TP14 TP15 TP16 TP17 TP18 TP19 TP20 TP21 TP22 TP23 TP24 TP25: library part "Test Point", "Test point ,1.5mm diameter, no hole", Category=testpoints
U1: "synchronous boost convertor with low / power consumption and provides a power supply for / products powered by either two-cell alkaline/NiCd/NiMH / or one-cell alkaline/Li-ion or Li-polymer battery. / Output currents can go as high as 500mA(VIN=1.8V)", JLCPCB part #=C181966, ComponentLink1Description=Datasheet, ComponentLink1URL=https://eu.mouser.com/datasheet/2/348/bu33uv7nux-e-1874391.pdf
U2: library part ESP32-S2-MINI-1, "WiFi 802.11b/g/n Transceiver Module 2.412GHz ~ 2.484GHz Antenna Not Included Surface Mount", JLCPCB part #=C3013906, Package="NON STANDARD-65 Espressif Systems", Availability="In Stock", Check_prices=https://www.snapeda.com/parts/ESP32-S2-MINI-1/Espressif+Systems/view-part/?ref=eda, MF="Espressif Systems", MP=ESP32-S2-MINI-1, Price=None, Purchase-URL=https://pricing.snapeda.com/search/part/ESP32-S2-MINI-1/?ref=eda, SnapEDA_Link=https://www.snapeda.com/parts/ESP32-S2-MINI-1/Espressif+Systems/view-part/?ref=snap
U3: library part CMP-144040-000003-1, "SENSOR HUMI/TEMP I2C 2% SMD", JLCPCB part #=C2880044, Manufacturer=Sensirion, Max Supply Voltage=3.6V, Min Supply Voltage=1.62V, Operating Supply Current=0.3-900uA, Package=0, Temperature="-40°C to +125°C", Temperature Range High=+125°C, Temperature Range Low=-40°C, Accuracy=2%, Automotive=No, Category=IC, ComponentLink2Description=Datasheet, ComponentLink2URL=https://www.sensirion.com/fileadmin/user_upload/customers/sensirion/Dokumente/0_Datasheets/Humidity/Sensirion_Humidity_Sensors_SHTC3_Datasheet.pdf, Device Class L1=Sensors, Device Class L2="Temperature and Humidity Sensors", Device Class L3=unset, Digikey Description="SENSOR HUMI/TEMP I2C 2% SMD", Height=0.75mm, Interface=I2C, Ipc Land Pattern Name=DFN200X200X75-4, Lead Free=Yes, Manufacturer Part Number=SHTC3, Mouser Description="SHTC3 Series 0 to 100% RH 3.6 V Humidity and Temperature Sensor IC - DFN-4", Octopart=https://octopart.com/shtc3-sensirion-91912225, Resolution=16bits, ROHS=TRUE, Sensor Output=I2C

## Via types
v1: diameter 0.7, hole 0.3, Top Layer to Bottom Layer, tented both sides, 177 vias

## Nets (pads, with @x,y where several pads share a name; then routed paths per layer and width w, separated by ;. In a path a pad name is that pad's centre, name@x,y a point inside that pad or via, vN(x,y) a via of type N, cw(c..) or ccw(c..) an arc to the next point about the centre after c; other vN are vias at no path point)
+3V3: C5.1 C8.1 C12.1 C19.1 C20.1 C22.1 J1.15 J1.16 J3.1 J3.2 J4.1 L2.1 R2.1 R9.2 R10.2 R11.2 SW1.2 SW2.2 SW3.2 SW4.2 TP13.1 U1.3 U1.7 U2.3 U3.1 | length 266.5
  Top Layer w0.2: v1(-24.067,26.883) -22.7,28.25 -18.9,28.25 -18.415,27.765 -15,27.765 ; U3.1 -22.298,0.025 C22.1 -21.127,-0.173 -20.675,-0.625 R11.2 -20.3,-0.925 -19.65,-0.925 R10.2 ; R9.2 -15.14,16.9 J3.1 J3.2 ; -11.825,-13.975 v1(-10.125,-13.975) ; C12.1 0.825,-21.846 1.181,-22.202 1.527,-22.202 1.675,-22.35 1.675,-22.7 1.85,-22.875 1.9,-22.925 2.25,-22.925 R2.1 ; 9.025,28.35 10.6,28.35 11.55,27.4 18.8,27.4 19.7,26.5 v1(22.258,26.5) 23.925,26.5 28.375,22.05 28.375,13.563 28.535,13.403 28.535,12.897 28.375,12.737 28.375,10.967 28.65,10.692 v1(28.65,10.6) ; C5.1@13.281,21.404 13.579,21.702 13.579,22.004 14.325,22.75 15.922,22.75 17.46,21.212 17.46,20.135 17.215,19.89 16.597,19.89 16.487,20 U1.3 ; v1(23.8,-19.478) 25.925,-17.353 v1(25.925,-15.4) ; v1(28.625,-8.275) 28.637,-8.263 28.637,6.412 v1(28.65,6.425) ; -1.75,-15.8 J1.16 -1.75,-13.85 -1.5,-13.6 -1.25,-13.85 J1.15 -1.25,-15.8 -1.5,-16.05 -1.75,-15.8
  Top Layer w0.3: -11.175,-11.764 -9.289,-11.764 -8.1,-10.575 -8.1,-10 -7.7,-9.6 -6.35,-9.6 -2.725,-13.225 -1.875,-13.225 -1.5,-13.6 ; -5.5,12.5 U2.3 ; C5.1 13.026,21.449 13.176,21.299 13.529,20.946 13.975,20.5 U1.7
  Top Layer w0.4: J4.1 -26.775,14.3 -19.825,14.3 -19.175,13.65 -15,13.65 ; R10.2 -19.325,-1.175 -18.282,-2.218 -17.582,-2.218 v1(-17.525,-2.275) ; v1(-12.35,-2.25) -11.175,-2.25 ; -1.5,-16.05 -1.5,-16.5 0.825,-18.825 C12.1
  Top Layer w0.6: C19.1 -15.037,15.112 -15.037,17.003 J3.1
  Top Layer w0.8: C19.1 -15,15.001 -15,13.65 -15,12.55 -14.325,11.875 -10.825,11.875 -9.476,10.526 -5.565,10.526 ; J3.2 -15,27.765 -15,28.631 -14.531,29.1 8.275,29.1 9.025,28.35 9.025,23.75 v1(8.975,23.7) 11.199,21.476 12.772,21.476 C5.1 ; C8.1@-13.737,-15.537 C8.1 ; L2.1@-11.237,-16.361 L2.1 -11.577,-16.047 -13.278,-16.047 -13.774,-15.551 C8.1 ; -5.5,12.5 -5.5,11.7 -5.509,11.7 -5.565,11.644 -5.565,10.526 ; C8.1 -13.65,-15.376 -13.65,-14.4 -13.225,-13.975 -11.825,-13.975 -11.175,-13.325 -11.175,-11.764 -11.175,-2.25 -11.175,0.025 -5.565,5.635 -5.565,10.526
  Bottom Layer w0.2: v1(-24.067,26.883) -24.067,26.825 SW2.2 ; SW4.2 -23.053,-20.189 -23.053,-19.694 -22.982,-19.624 -22.982,-17.947 -19.371,-14.335 -11.001,-14.335 -10.737,-14.071 -10.221,-14.071 v1(-10.125,-13.975) ; v1(22.258,26.5) SW1.2 ; SW3.2 v1(23.8,-19.478) ; v1(25.925,-15.4) 28.625,-12.7 v1(28.625,-8.275) ; v1(28.65,6.425) v1(28.65,10.6)
  Bottom Layer w0.4: v1(-17.525,-2.275) -17.512,-2.262 -12.363,-2.262 v1(-12.35,-2.25)
  Bottom Layer w0.8: TP13.1 3.848,21.628 3.848,23.023 4.525,23.7 v1(8.975,23.7)
+VBAT: C1.1 CN2.1 CN4.1 J2.1 J2.2 L1.1 R3.2 R4.2 R5.2 TP14.1 U1.4 U1.6 U1.10 | length 98.5
  Top Layer w0.2: 13.95,18.425 13.95,18.715 14.235,19 U1.10 ; U1.6 14.4,22.04 14.75,22.39 15.773,22.39 16.85,21.313 v1(16.85,20.5) ; 14.473,14.729 14.519,14.775 15.529,14.775 v1(15.625,14.775) 15.529,14.871 v1@15.529,15.017 ; J2.2 J2.1 15.795,13.36 16.935,14.5 R3.2 18.425,14.8 18.425,15.275 19.891,16.741 19.891,17.016 20.425,17.55 21.1,17.55 21.56,18.01 22.265,18.01 22.95,17.325 24.05,17.325 24.425,16.95 24.5,16.875 v1(24.5,15.725) ; R4.2 R5.2 26.831,15.45 v1(27.725,15.45)
  Top Layer w0.25: U1.4 v1(16.85,20.5)
  Top Layer w0.5: 13.95,18.15 13.95,18.425
  Top Layer w0.8: v1(7.95,17.3) 8.75,16.5 8.75,15.819 9.212,15.356 11.394,15.356 L1.1@11.4,15.35
  Top Layer w1: 13.387,16.4 13.95,16.963 13.95,18.15 ; C1.1@14.473,15.871 14.473,14.729 14.473,13.587 J2.1 ; C1.1@14.474,15.872 C1.1 ; CN4.1@14.66,8.5 14.7,8.54 J2.2
  Top Layer w1.5: L1.1 11.4,15.35 12.45,16.4 13.387,16.4 14.324,16.4 14.345,16.379 14.376,16.379 14.474,16.282 C1.1 ; CN2.1 12.5,-18.246 10.875,-16.621 10.875,-6.95 14.66,-3.165 14.66,8.5 CN4.1@27.51,8.5
  Bottom Layer w0.2: v1(15.625,14.775) 16.125,15.275 16.8,15.275 17.675,16.15 17.675,19.675 v1(16.85,20.5) ; v1(24.5,15.725) 25.95,15.725 26.225,15.45 v1(27.725,15.45)
  Bottom Layer w0.8: TP14.1 6.35,18.9 v1(7.95,17.3)
BAT_NEG: CN2.2 CN6.1 Q2.3 TP22.1 | length 99.7
  Top Layer w0.7: Q2.3 23.135,15.725 v1@24.1,14.76 ; v1(24.1,13.2) v1(24.1,13.9) v1@24.1,14.76 ; v1(24.1,14.6) v1@24.1,14.76
  Top Layer w1: v1(24.1,3.05) v1(24.1,2.35) v1(24.1,1.65) 24.1,-10.419 24.181,-10.5
  Top Layer w1.5: CN2.2@12.725,-25.625 12.808,-25.708 15.553,-25.708 17.77,-27.925 21.625,-27.925 27.375,-22.175 CN6.1@27.375,-10.5 ; CN6.1@14.66,-10.5 24.181,-10.5 CN6.1@27.375,-10.5 ; CN6.1@27.51,-10.5 CN6.1@27.375,-10.5
  Bottom Layer w0.7: TP22.1 3.81,15.904 6.514,13.2 v1(24.1,13.2)
  Bottom Layer w1: v1(24.1,1.65) v1(24.1,2.35) v1(24.1,3.05) v1(24.1,13.2) v1(24.1,13.9) v1(24.1,14.6)
BTN_1: R12.2 U2.25 | length 24.1
  Top Layer w0.2: U2.25 6.75,22.25 6.925,22.425 6.925,26.575 v1(7.725,27.375) ; v1(10.025,27.35) 10.61,26.765 18.485,26.765 20.975,24.275 21.65,24.275 R12.2
  Bottom Layer w0.2: v1(7.725,27.375) 7.738,27.363 10.012,27.363 v1(10.025,27.35)
BTN_2: R15.2 U2.5 | length 34.7
  Top Layer w0.2: R15.2 -26.4,16.95 -24.675,15.225 v1(-21.15,15.225) ; v1(-11.075,10.35) -10.983,10.442 -10.325,10.442 -9.749,9.866 -8.091,9.866 v1(-6.475,8.25) ; v1(-4,8.225) -4,8.286 -3.5,8.786 -3.5,10.45 -3.8,10.75 U2.5
  Bottom Layer w0.2: v1(-21.15,15.225) -14.94,9.015 -11.697,9.015 -11.669,9.044 -11.531,9.044 -11.075,9.5 v1(-11.075,10.35) ; v1(-6.475,8.25) -6.463,8.237 -4.012,8.237 v1(-4,8.225)
BTN_3: R18.2 U2.18 | length 49.8
  Top Layer w0.2: U2.18 6.9,16.3 7.65,15.55 7.65,-6.65 v1(9.3,-8.3) ; v1(17.6,-16.3) 17.6,-19.725 16.775,-20.55 16.775,-22.15 17.6,-22.975 19.725,-22.975 20.15,-22.55 20.55,-22.55 R18.2
  Bottom Layer w0.2: v1(9.3,-8.3) 13.266,-12.266 13.566,-12.266 v1(17.6,-16.3)
BTN_4: R21.2 U2.8 | length 47
  Top Layer w0.2: R21.2 v1(-23.425,-16.675) ; v1(-9.665,-10.1) -9.665,-8.375 -9.915,-8.125 -9.915,-0.324 -2.275,7.316 -2.275,10.35 -1.25,11.375 U2.8
  Bottom Layer w0.2: v1(-23.425,-16.675) -22.729,-16.675 -19.669,-13.615 -11.299,-13.615 -10.625,-12.941 -10.625,-12.075 -10.875,-11.825 -10.875,-10.722 -10.315,-10.162 -9.727,-10.162 v1(-9.665,-10.1)
DBG_GPIO: TP23.1 U2.20 | length 7.4
  Top Layer w0.2: U2.20 7.725,18 8.5,18.775 v1(8.5,19.6)
  Bottom Layer w0.2: TP23.1 7.04,20.9 8.183,20.9 8.5,20.583 v1(8.5,19.6)
DISP_BS: J1.8 R1.2 | length 7.7
  Top Layer w0.2: J1.8 2.25,-17.875 3.975,-19.6 R1.2
DISP_BUSY: J1.9 TP6.1 U2.11 | length 30.8
  Top Layer w0.2: U2.11 1.3,10.2 2.28,9.22 2.28,-3.482 v1(1.562,-4.2) ; J1.9 1.75,-11.875 2.05,-11.575 2.675,-11.575 3.2,-11.05 TP6.1 3.187,-9.287 3.187,-5.763 v1(3.175,-5.75)
  Bottom Layer w0.2: v1(1.562,-4.2) 3.113,-5.75 v1(3.175,-5.75)
DISP_CLK: J1.13 TP9.1 U2.32 | length 46.5
  Top Layer w0.2: J1.13 -0.25,-13.291 -1.8,-11.741 TP9.1 -1.8,-5.366 1.215,-2.351 1.215,7.41 v1(-0.15,8.775) ; v1(1.3,14.5) 1.3,14.635 1.668,15.003 1.668,15.193 3.85,17.375 U2.32
  Bottom Layer w0.2: v1(-0.15,8.775) -0.15,10.075 1.3,11.525 v1(1.3,14.5)
DISP_CS: J1.12 TP5.1 U2.29 | length 43.9
  Top Layer w0.2: J1.12 0.25,-13.282 -0.5,-12.532 TP5.1 -0.5,-4.575 1.575,-2.5 v1(1.575,8.775) ; v1(3.4,14.5) 3.4,15.296 4.575,16.471 4.575,25.325 4.88,25.63 5.73,25.63 U2.29
  Bottom Layer w0.2: v1(1.575,8.775) 3.4,10.6 v1(3.4,14.5)
DISP_D/C: J1.11 TP8.1 U2.12 | length 29.4
  Top Layer w0.2: J1.11 0.775,-14.794 0.775,-9.325 TP8.1 0.8,-6.191 2.64,-4.351 2.64,9.76 2.15,10.25 U2.12
DISP_GDR: J1.2 Q1.1 R6.2 | length 28.7
  Top Layer w0.2: R6.2 -17.948,-16.977 -17.575,-17.35 -16.626,-17.35 Q1.1 -14.45,-17.425 v1(-14.1,-17.075) ; J1.2 v1(5.25,-12.675)
  Bottom Layer w0.2: v1(-14.1,-17.075) -8.859,-17.075 -8.074,-16.29 3.585,-16.29 5.25,-14.625 v1(5.25,-12.675)
DISP_PREVGH: C9.1 D3.1 J1.21 TP2.1 | length 21.4
  Top Layer w0.3: C9.1@-10.639,-22.45 -10.05,-22.45 -9.325,-21.725 -9.325,-12.575 -8.39,-11.64 -7.2,-11.64 ; TP2.1 -7.2,-11.64 ; J1.21 -4.25,-12.975 -5.585,-11.64 -7.2,-11.64
  Top Layer w0.5: C9.1 -10.644,-22.267 -10.644,-21.956 -10.639,-21.951 D3.1@-10.639,-20.808
DISP_PREVGL: C6.1 D1.2 J1.23 TP1.1 | length 28.4
  Top Layer w0.3: C6.1 -11.4,-26.825 -8.865,-24.29 -8.865,-13.115 -8.2,-12.45 TP1.1 -5.7,-12.45 -5.25,-12.9 J1.23
  Top Layer w0.5: D1.2 -17.617,-24.85 -16.604,-25.863 -16.604,-26.619 -16.398,-26.825 C6.1
DISP_RESE: J1.3 Q1.2 R7.1 | length 29.3
  Top Layer w0.2: R7.1 -17.996,-18.663 -17.518,-18.185 -15.976,-18.185 -14.875,-19.285 v1(-14.875,-19.35) ; J1.3 4.75,-16.025 v1(5.375,-16.65)
  Top Layer w0.5: R7.1 -18.137,-18.743 -17.555,-19.325 Q1.2
  Bottom Layer w0.2: v1(-14.875,-19.35) -10.625,-19.35 -7.925,-16.65 v1(5.375,-16.65)
DISP_RST: J1.10 R2.2 TP10.1 U2.13 | length 36.7
  Top Layer w0.2: R2.2 2.55,-19.15 1.25,-17.85 J1.10 1.25,-11.15 TP10.1 2,-5.5 3,-4.5 U2.13
DISP_SDI: J1.14 TP7.1 U2.31 | length 48
  Top Layer w0.2: J1.14 -0.75,-13.3 -1.45,-12.6 -2.475,-12.6 -3.1,-11.975 TP7.1 -3.1,-6.157 0.855,-2.202 0.855,6.495 v1(-0.175,7.525) ; v1(2.3,14.5) 2.3,14.564 2.728,14.991 2.728,15.133 4.21,16.615 4.21,17.26 4.215,17.265 4.215,26.172 4.7,26.657 U2.31
  Bottom Layer w0.2: v1(-0.175,7.525) 0.65,8.35 0.65,9.5 2.3,11.15 v1(2.3,14.5)
ESP_DBG_RX: CN1.3 TP17.1 U2.40 | length 49.4
  Top Layer w0.2: CN1.3 -26.125,-0.525 -26.125,0.675 -24,2.8 -18.025,2.8 v1(-16.9,1.675) ; v1(-12.475,3.45) -11.675,3.45 -8.15,6.975 v1(-8.15,7.575) ; v1(-4.1,23.9) -4.044,23.956 -3.636,23.956 -2.95,24.642 U2.40
  Bottom Layer w0.2: v1(-16.9,1.675) -14.25,1.675 v1(-12.475,3.45) ; v1(-8.15,7.575) -8.15,9.3 -7.7,9.75 -7.7,12.5 -3.81,16.39 TP17.1 -2.9,19.96 -2.9,23.1 -3.252,23.452 -3.629,23.452 -4.076,23.9 v1(-4.1,23.9)
ESP_DBG_TX: CN1.2 TP16.1 U2.39 | length 52
  Top Layer w0.2: CN1.2 -28.3,-3.682 -29.025,-2.957 -29.025,-1.5 -28.5,-0.975 -27.084,-0.975 -26.485,-0.376 -26.485,0.824 -24.05,3.259 -17.509,3.259 v1(-16.9,2.65) ; v1(-12.475,4.4) -11.725,4.4 -8.946,7.179 -8.946,8.329 v1(-8.85,8.425) ; v1(-4.1,22.9) -2.1,24.9 U2.39
  Bottom Layer w0.2: v1(-16.9,2.65) -14.225,2.65 v1(-12.475,4.4) ; v1(-8.85,8.425) -8.85,9.3 -8.075,10.075 -8.075,12.634 -4.775,15.934 -4.775,20.625 -3.805,21.595 -3.805,22.47 -4.1,22.765 v1(-4.1,22.9)
ESP_EN: C21.1 R9.1 SW6.2 TP4.1 U2.45 | length 45.1
  Top Layer w0.2: SW6.2@-20.077,23.636 SW6.2 ; SW6.2@-19.582,24.131 SW6.2 ; R9.1 -16.55,18.2 C21.1 -19.3,18.2 -20.15,17.35 -22.775,17.35 -23.175,17.75 -23.175,18.825 -22.25,19.75 -22.25,24.43 -21.312,25.367 ; v1(-16.375,26.65) -20.05,26.65 -21.312,25.388 -21.312,25.367 ; U2.45 -7.2,25.05 v1(-6.375,24.225) ; -21.312,25.367 SW6.2
  Bottom Layer w0.2: v1(-16.375,26.65) -16.375,27.256 -14.531,29.1 -8.7,29.1 -7.7,28.1 -7.7,25.55 v1(-6.375,24.225) -6.363,24.213 -6.363,21.602 TP4.1
ESP_IO0: SW5.2 TP15.1 U2.4 | length 53.2
  Top Layer w0.09: v1@-10.275,-10.95 -10.275,-10.965 v1(-10.265,-10.975)
  Top Layer w0.2: v1(-24.925,-18.075) -23.984,-19.016 SW5.2 ; v1@-10.275,-10.95 -10.275,-0.175 -4.65,5.45 U2.4 -4.65,14.75 -6.35,16.45 v1(-6.35,17.8)
  Bottom Layer w0.2: v1(-24.925,-18.075) -23.62,-18.075 -19.52,-13.975 -11.15,-13.975 -10.265,-13.09 v1(-10.265,-10.975) ; v1(-6.35,17.8) TP15.1
ESP_SCL: R10.1 TP11.1 U2.15 U3.2 | length 44.2
  Top Layer w0.2: U3.2 -24.9,0.7 -24.7,0.9 -22.4,0.9 ; TP11.1 -22.4,0.9 ; v1(-17.8,-0.775) -17.8,-0.05 -18.025,0.175 R10.1 -19.475,0.175 -20.2,0.9 -22.4,0.9 ; v1(-8.425,-1.6) -7.025,-1.6 -3.575,1.85 v1(0.175,1.85) ; v1(3.875,4.175) 4.01,4.175 4.7,4.865 U2.15
  Bottom Layer w0.2: v1(-17.8,-0.775) -16.975,-1.6 v1(-8.425,-1.6) ; v1(0.175,1.85) 0.225,1.8 1.5,1.8 v1(3.875,4.175)
ESP_SDA: R11.1 TP12.1 U2.14 U3.3 | length 44.2
  Top Layer w0.2: U3.3 -24.832,-1.893 -24.832,-2.507 -24.632,-2.707 -22.327,-2.707 ; TP12.1 -22.332,-3.632 -22.332,-2.712 -22.327,-2.707 ; R11.1@-20.607,-1.982 -20.682,-1.982 -20.975,-2.275 -20.975,-2.35 -21.332,-2.707 -22.327,-2.707 ; R11.1@-20.525,-2.05 R11.1 -20.525,-1.975 -19.725,-1.975 -18.775,-2.925 -17.125,-2.925 -16.8,-2.6 v1(-16.8,-0.825) v1@-16.732,-0.893 ; v1(-7.65,-0.915) -7.558,-0.823 -7.223,-0.823 -4.19,2.21 -0.69,2.21 v1(0.15,3.05) ; U2.14@3.863,13.55 3.863,5.288 v1(3.875,5.275)
  Bottom Layer w0.2: v1(-16.8,-0.825) -16.755,-0.87 -7.695,-0.87 v1(-7.65,-0.915) ; v1(0.15,3.05) 1.65,3.05 v1(3.875,5.275)
ESP_TCK: TP18.1 U2.35 | length 9.5
  Top Layer w0.2: U2.35 1.3,23.35 1.471,23.179 1.686,23.179 2.065,22.8 v1(2.2,22.8)
  Bottom Layer w0.2: TP18.1 2.2,19.98 v1(2.2,22.8)
ESP_TDI: TP20.1 U2.37 | length 9
  Top Layer w0.2: U2.37 -0.4,25.25 -0.3,25.15 -0.3,24.582 v1(-0.218,24.5)
  Bottom Layer w0.2: TP20.1 -0.275,20.045 -0.275,24.443 v1(-0.218,24.5)
ESP_TDO: TP19.1 U2.36 | length 6.4
  Top Layer w0.2: v1(0.335,23.539) 0.392,23.597 0.392,27.493 U2.36
  Bottom Layer w0.2: v1(0.335,23.539) 0.335,22.525 TP19.1
ESP_TMS: TP21.1 U2.38 | length 6.7
  Top Layer w0.2: v1(-2.1,23.4) -1.965,23.4 -1.25,24.115 U2.38
  Bottom Layer w0.2: v1(-2.1,23.4) -1.27,22.57 TP21.1
GND: C1.2 C3.2 C5.2 C6.2 C8.2 C9.2 C10.2 C11.2 C12.2 C13.2 C14.2 C15.2 C16.2 C17.2 C18.2 C19.2 C20.2 C21.2 C22.2 CN1.5 D2.1 J1.17 J1.MP1 J1.MP2 LED1.2 LED2.2 LED3.2 LED4.2 Q2.2 R1.1 R6.1 R7.2 R8.1 R13.1 R17.1 R20.1 R23.1 SW5.4 SW6.4 TP24.1 TP25.1 U1.2 U1.9 U1.PAD U2.1 U2.2 U2.30 U2.42 U2.43 U2.46 U2.47 U2.48 U2.49 U2.50 U2.51 U2.52 U2.53 U2.54 U2.55 U2.56 U2.57 U2.58 U2.59 U2.60 U2.61 U2.61_1 U2.61_2 U2.61_3 U2.61_4 U2.61_5 U2.61_6 U2.61_7 U2.61_8 U2.62 U2.63 U2.64 U2.65 U3.4 | length 75.4
  Top Layer w0.2: R17.1 -27.75,18.275 v1(-27.75,17.375) ; v1(-27.575,-20.775) -26.671,-21.679 SW5.4 ; U3.4 v1(-23.099,-1.825) -22.298,-1.825 C22.2 ; SW6.4 v1(-21.575,27.512) ; v1(-22.125,18.125) -21.487,18.763 LED2.2@-21.237,18.763 ; LED4.2@-18.763,-21.237 -18.275,-21.725 v1(-18.275,-22.575) ; C21.2@-18.221,16.625 C21.2 -17.95,16.596 -17.95,15.199 C19.2 ; U2.62 U2.60 U2.57 U2.55 U2.53 U2.51 U2.48 U2.46 U2.65 ; U2.61_7 v1(-1.25,20.55) ; J1.17 -2.25,-17.475 v1(-1.35,-18.375) ; U2.61_1 v1(-1.25,20.55) ; U2.61_5 v1(-1.25,20.55) ; U2.61_3 v1(-1.25,20.55) ; U1.9 15,19.5 U1.PAD@15.2,19.7 ; v1(15.2,18.425) U1.PAD@15.2,19.7 ; v1(15.2,21.575) U1.PAD U1.PAD@15.2,19.7 ; U1.2 15.4,19.5 U1.PAD@15.2,19.7 ; v1(18,-22) LED3.2@18.763,-21.237 ; v1(19.825,18) 19.909,18 20.672,18.763 LED1.2@21.237,18.763 ; v1(21.55,-21.725) 22.173,-22.348 R20.1 ; R13.1 26.575,21.325 26.575,20.6 v1(26.55,20.575) ; R8.1 26.823,18.39 C18.2 v1(26.875,19.44)
  Top Layer w0.3: v1(-18.8,-26.85) -17.854,-26.85 C6.2 ; C17.2 -7.623,-23.1 v1(-6.9,-23.1) -6.252,-23.1 C16.2 ; C16.2@-6.075,-23.254 -5.921,-23.1 v1(-5.2,-23.1) -4.527,-23.1 C15.2 ; C15.2@-4.35,-23.254 -4.196,-23.1 v1(-3.5,-23.1) -2.802,-23.1 C14.2 ; C14.2@-2.625,-23.254 -2.471,-23.1 v1(-1.8,-23.1) -1.077,-23.1 C13.2 ; C13.2@-0.9,-23.254 -0.771,-23.125 v1(-0.05,-23.125) 0.673,-23.125 C12.2 ; R1.1 4.025,-23.15 4.825,-23.15 v1(4.875,-23.1) 5.623,-23.1 C11.2 C10.2
  Top Layer w0.5: v1(-20,-17.1) -19.946,-17.1 -19.409,-17.637 R7.2 ; R6.1 -18.765,-16.023 -18.381,-15.638 -17.913,-15.638 v1(-17.875,-15.6) ; v1(-16.8,-16) -16.103,-16 -15.626,-15.523 C8.2
  Top Layer w0.6: v1(-18.9,14.775) -18.888,14.787 C19.2@-17.765,14.787 ; v1(15.2,18.425) v1@15.219,18.406
  Top Layer w0.7: D2.1 v1(-12.75,-21.3) ; C9.2 -10.8,-23.977 v1(-10.8,-24.85) ; C5.2 13.099,24.5 v1(14.175,24.5) ; C1.2@17.368,16.391 C1.2 v1(18.299,16.25) ; C3.2@18.464,17.786 C3.2 v1(19.15,17.25) ; v1(21.15,16.675) Q2.2@21.923,16.675 ; v1(21.925,17.4) 21.925,16.739 21.989,16.675 Q2.2 ; Q2.2@21.987,16.65 v1(23.425,16.65)
  other v1: 10.425,-28.325 -9.025,-27.35 -7.975,-24.575 25.6,-20.225 1.65,-20.2 8.575,-19.8 24.7,-16.1 13.875,-15.05 -27.85,-14.55 -7.225,-14.3 28.825,-14.3 7.575,-9.475 -5.975,-5.375 0.525,-5.2 -23.875,-4.9 -19.7,-4.875 12.575,-3 21.325,-2.525 6.1,-1.35 -1.7,-0.675 0.175,0.775 -17.825,1.225 3.625,2.15 25.375,2.15 -9.7,3.65 0.15,4.175 -1.925,4.525 11.025,6.7 -11.325,7.55 6.3,9.15 27.3,11.075 9.075,12.1 13.1,12.2 5.7,12.35 27.925,13.15 13.125,14.125 8.975,14.15 -0.3,14.5 -3.15,14.65 -7.125,14.925 6.85,15.125 29.075,15.35 -23.875,16.85 -7.1,20.325 -7.175,23.35 -27.725,23.6 16.675,23.775 10.6,24.375 -16.775,24.575 -5.05,25.125 2.075,25.475 21,25.55 25.75,26.5 12.525,28.6 -16.925,28.825
LED_1: R14.1 U2.21 | length 20.1
  Top Layer w0.2: U2.21 7.35,18.85 7.7,19.2 v1(7.7,25.15) ; v1(11.95,25.525) 16.555,25.525 R14.1
  Bottom Layer w0.2: v1(7.7,25.15) 8.075,25.525 v1(11.95,25.525)
LED_2: R16.1 U2.6 | length 35.7
  Top Layer w0.2: v1(-17.4,19.35) -16.55,20.2 -16.55,21.45 R16.1 ; v1(-11.95,9.625) -10.087,9.625 -9.968,9.506 -8.24,9.506 -7.283,8.549 -7.283,7.933 -7.2,7.85 -7.2,7.375 v1(-6.7,6.875) ; v1(-4,6.9) -2.95,7.95 U2.6
  Bottom Layer w0.2: v1(-17.4,19.35) -17.485,19.265 -17.835,19.265 -19.6,17.5 -19.6,14.184 -15.041,9.625 v1(-11.95,9.625) ; v1(-6.7,6.875) -6.687,6.887 -4.012,6.887 v1(-4,6.9)
LED_3: R19.1 U2.19 | length 42.7
  Top Layer w0.2: U2.19 5.8,17.2 6.9,17.2 8.05,16.05 8.05,-6.05 v1(9.3,-7.3) ; v1(18.5,-16.3) 19.643,-16.3 19.793,-16.15 20.8,-16.15 R19.1
  Bottom Layer w0.2: v1(9.3,-7.3) 9.396,-7.396 9.596,-7.396 v1(18.5,-16.3)
LED_4: R22.1 U2.9 | length 47.3
  Top Layer w0.2: v1(-22.883,-15.967) -21.752,-17.098 R22.1 ; v1(-8.75,-9.525) -8.75,-7.329 -9.555,-6.524 -9.555,-0.473 -1.75,7.332 -1.75,9.875 -0.4,11.225 U2.9
  Bottom Layer w0.2: v1(-22.883,-15.967) -22.87,-15.967 -22.516,-15.613 -22.176,-15.613 -19.818,-13.255 -11.69,-13.255 -10.985,-12.55 -10.985,-12.224 -11.235,-11.974 -11.235,-10.573 -10.152,-9.49 -8.785,-9.49 v1(-8.75,-9.525)
NetC3_1: C3.1 U1.1 | length 1.5
  Top Layer w0.2: U1.1 17.144,19 17.244,18.9 17.308,18.964 C3.1
NetC7_1: C7.1 D1.1 D2.2 | length 4.8
  Top Layer w0.5: C7.1 -15.574,-22.901 -15.097,-23.378 -15.097,-24.236 -14.483,-24.85 D1.1 -13.173,-24.85 -12.804,-25.219 -12.804,-25.676 D2.2
NetC7_2: C7.2 D3.2 L2.2 Q1.3 | length 7.3
  Top Layer w0.8: C7.2 -15.451,-20.875 -14.525,-20.875 -14.359,-20.709 -13.789,-20.709 D3.2 -13.78,-19.332 ; Q1.3 -14.111,-18.375 -13.78,-18.706 -13.78,-19.332 ; L2.2 -11.556,-19.332 -13.78,-19.332
NetC10_1: C10.1 J1.4 | length 8.3
  Top Layer w0.2: J1.4 4.25,-17.725 7.475,-20.95 C10.1
NetC11_1: C11.1 J1.5 | length 7.8
  Top Layer w0.2: J1.5 3.75,-18.25 5.75,-20.25 C11.1
NetC13_1: C13.1 J1.18 | length 7.8
  Top Layer w0.2: J1.18 -2.75,-18.7 -0.9,-20.55 C13.1
NetC14_1: C14.1 J1.19 | length 7.3
  Top Layer w0.2: J1.19 -3.25,-19.2 -2.625,-19.825 C14.1
NetC15_1: C15.1 J1.20 | length 7.3
  Top Layer w0.2: C15.1 -4.35,-20.575 -3.75,-19.975 J1.20
NetC16_1: C16.1 J1.22 | length 7.6
  Top Layer w0.2: C16.1 -6.1,-21.798 -6.1,-20.85 -4.75,-19.5 J1.22
NetC17_1: C17.1 J1.24 | length 7.9
  Top Layer w0.2: C17.1 -7.511,-21.534 -7.511,-21.161 -5.75,-19.4 J1.24
NetCN3_1: CN3.1 CN5.1 | length 44.7
  Top Layer w1.5: CN3.1@-27.51,-10.5 CN3.1@-14.66,-10.5 ; CN5.1@-27.51,8.5 CN5.1@-14.66,8.5
  Top Layer w3: CN3.1@-14.66,-10.5 CN5.1@-14.66,8.5
NetL1_2: L1.2 U1.8 | length 3.5
  Top Layer w0.2: 13.44,19.69 13.75,20 U1.8
  Top Layer w1: L1.2 11.34,19.69 13.44,19.69
NetLED1_1: LED1.1 R14.2 | length 1.6
  Top Layer w0.2: R14.2 17.748,22.252 LED1.1@18.763,21.237
NetLED2_1: LED2.1 R16.2 | length 2
  Top Layer w0.2: LED2.1@-18.763,21.237 -18.882,21.357 -18.882,21.923 R16.2
NetLED3_1: LED3.1 R19.2 | length 1.6
  Top Layer w0.2: LED3.1@21.237,-18.763 22.302,-17.698 R19.2
NetLED4_1: LED4.1 R22.2 | length 1.6
  Top Layer w0.2: R22.2 -21.81,-18.77 -21.244,-18.77 LED4.1@-21.237,-18.763
NetQ2_1: Q2.1 R3.1 | length 3
  Top Layer w0.2: R3.1 20.15,14.5 20.425,14.775 Q2.1
NetR12_1: R12.1 R13.2 SW1.3 | length 4.5
  Top Layer w0.2: v1(24.7,20.7) 24.663,20.737 24.663,21.156 24.28,21.539 24.28,21.88 25.048,22.648 R13.2
  Bottom Layer w0.2: SW1.3 22.997,20.26 23.437,20.7 v1(24.7,20.7)
NetR15_1: R15.1 R17.2 SW2.3 | length 5.7
  Top Layer w0.2: R17.2 R15.1 -26.325,19.65 -25.425,20.55 v1(-25.375,20.55)
  Bottom Layer w0.2: v1(-25.375,20.55) -25.375,20.575 -24.85,21.1 -23.858,21.1 SW2.3
NetR18_1: R18.1 R20.2 SW3.3 | length 5
  Top Layer w0.2: v1(21.125,-25.25) 22.16,-24.215 R18.1 22.286,-24.16 23.143,-23.302 R20.2
  Bottom Layer w0.2: v1(21.125,-25.25) 21.997,-25.25 22.487,-25.74 SW3.3
NetR21_1: R21.1 R23.2 SW4.3 | length 19.7
  Top Layer w0.2: R21.1 -27.05,-16.675 -28.5,-18.125 -28.5,-21.7 v1(-23.7,-26.5) -22.225,-27.975 -20.6,-27.975 -20.15,-27.525 R23.2
  Bottom Layer w0.2: v1(-23.7,-26.5) -23.018,-25.818 SW4.3
U2S_3V3: CN1.6 J4.2 | length 8.7
  Top Layer w0.5: v1(-28.275,10.925) -28.248,10.953 -28.248,13.998 J4.2
  Bottom Layer w0.5: CN1.6 -28.287,5.333 -28.287,10.913 v1(-28.275,10.925)
VBAT_ADC: C18.1 R4.1 R5.1 R8.2 TP3.1 U2.7 | length 47.6
  Top Layer w0.2: U2.7@-2.099,13.551 -2.099,14.657 -1.081,15.675 1.641,15.675 3.49,17.524 3.49,24.26 v1(3,24.75) ; v1(10,26.15) 18.25,26.15 21.704,22.696 21.704,20.321 22.828,19.197 22.828,18.872 TP3.1 23.542,18.442 C18.1 25.421,16.894 R8.2 R5.1 R4.1
  Bottom Layer w0.2: v1(3,24.75) 4.4,26.15 v1(7.7,26.15) v1(10,26.15)
pads on no net: CN1.1 CN1.4 J1.1 J1.6 J1.7 LED1.4 LED2.4 LED3.4 LED4.4 SW1.1 SW1.4 SW2.1 SW2.4 SW3.1 SW3.4 SW4.1 SW4.4 SW5.1 SW5.3 SW6.1 SW6.3 U1.5 U2.10 U2.16 U2.17 U2.22 U2.23 U2.24 U2.26 U2.27 U2.28 U2.33 U2.34 U2.41 U2.44 U3.5
copper on no net: | length 6.1
  Bottom Layer w0.2: 24.127,-11.379 25.249,-12.102 24.774,-12.502 25.674,-13.127 ; 24.139,-11.364 25.261,-10.641 24.786,-10.241 25.686,-9.616

## Polygon pours and split planes (outlines as drawn)
GND on Bottom Layer "bottom gnd pour" (solid, remove dead copper, pour order 5): -19.8,-29.7 -8.05,-29.7 ccw(c-8.05,-28.7) -7.05,-28.7 -7.05,-25.2 cw(c-6.05,-25.2) -6.05,-24.2 8.05,-24.2 cw(c8.05,-25.2) 9.05,-25.2 9.05,-28.7 ccw(c10.05,-28.7) 10.05,-29.7 19.8,-29.7 ccw(c19.8,-19.8) 29.7,-19.8 29.7,19.8 ccw(c19.8,19.8) 19.8,29.7 -19.8,29.7 ccw(c-19.8,19.8) -29.7,19.8 -29.7,-19.8 ccw(c-19.8,-19.8)
GND on Top Layer "top gnd pour" (solid, remove dead copper, pour order 4): -19.8,-29.7 -8.05,-29.7 ccw(c-8.05,-28.7) -7.05,-28.7 -7.05,-25.2 cw(c-6.05,-25.2) -6.05,-24.2 8.05,-24.2 cw(c8.05,-25.2) 9.05,-25.2 9.05,-28.7 ccw(c10.05,-28.7) 10.05,-29.7 19.8,-29.7 ccw(c19.8,-19.8) 29.7,-19.8 29.7,19.8 ccw(c19.8,19.8) 19.8,29.7 -19.8,29.7 ccw(c-19.8,19.8) -29.7,19.8 -29.7,-19.8 ccw(c-19.8,-19.8)

## Silkscreen, mask and mechanical layers (free items; w line width, h text height)
Top Overlay:
  text "RST" at -26.575,23.775 h2 r45
  text "+" at 6.8,5.375 h6
  text "-" at 6.725,-13.524 h6
  text "B+" at 15.45,-19.475 h2
  text "BL" at -28.5,-20.2 h2
  text "B-" at 15.5,-26.275 h2
Bottom Overlay:
  region: 22.9,-10.8 22.9,7.625 17.075,7.625 17.075,-10.8
  lines w0.3: -16,-23.075 -16,16 16,16 16.025,-22.95
  text "GND" at 1.8,24.75 h1.8
  text "TX" at -2.55,23.575 h1.8
  text "3V3" at 5.35,23.325 h1.8
  text "AUX" at 8.125,22.275 h1.8
  text "RST" at -4.725,22.225 h1.8
  text "TMS" at 0.3,22.1 h1.8
  text "TDO" at 3.525,22.1 h1.8
  text "Designed by PLab in Slovenia" at 28.2,20.587 h1 r90
  text "Home Buttons Mini" at -17.5,18.383 h1.6 r90
  text "B+" at 7.375,16.9 h1.8
  text "TCK" at 3.075,16.85 h1.8
  text "RX" at -2.55,16.7 h1.8
  text "IO0" at -5.15,16.025 h1.8
  text "B-" at 4.6,15.925 h1.8
  text "TDI" at 0.175,15.875 h1.8
  text "HW rev 1.1" at -15.15,5.8 h1 r90
  text "3V3" at -24.075,4.575 h1.8
  text "GND" at -23.25,1.975 h1.8
  text "RX" at -24.45,-3 h1.8
  text "TX" at -24.85,-5.575 h1.8
PCB edge outline:
  circle w0.069: c0,0 r0.5
  lines w0.069: -29.7,-19.8 ccw(c-19.8,-19.8) -19.8,-29.7 -8.05,-29.7 ccw(c-8.05,-28.7) -7.05,-28.7 -7.05,-25.2 cw(c-6.05,-25.2) -6.05,-24.2 8.05,-24.2 cw(c8.05,-25.2) 9.05,-25.2 9.05,-28.7 ccw(c10.05,-28.7) 10.05,-29.7 19.8,-29.7 ccw(c19.8,-19.8) 29.7,-19.8 29.7,19.8 ccw(c19.8,19.8) 19.8,29.7 -19.8,29.7 ccw(c-19.8,19.8) -29.7,19.8 -29.7,-19.8 ; 13.74,-27.785 13.74,-23.285 17.74,-23.285 17.74,-27.785 13.74,-27.785 ; 13.74,-21.285 13.74,-16.785 17.74,-16.785 17.74,-21.285 13.74,-21.285

## Text inside footprints (layer, text, board x,y; h text height)
CN1: Top Overlay "CP2102 USB-to-UART" at -25.9,-8.18 h0.8 r90